# EAGLE board SparkFun_MAX30101_Qwiic-Panel (EAGLE 9.5.2), part 1 of 5
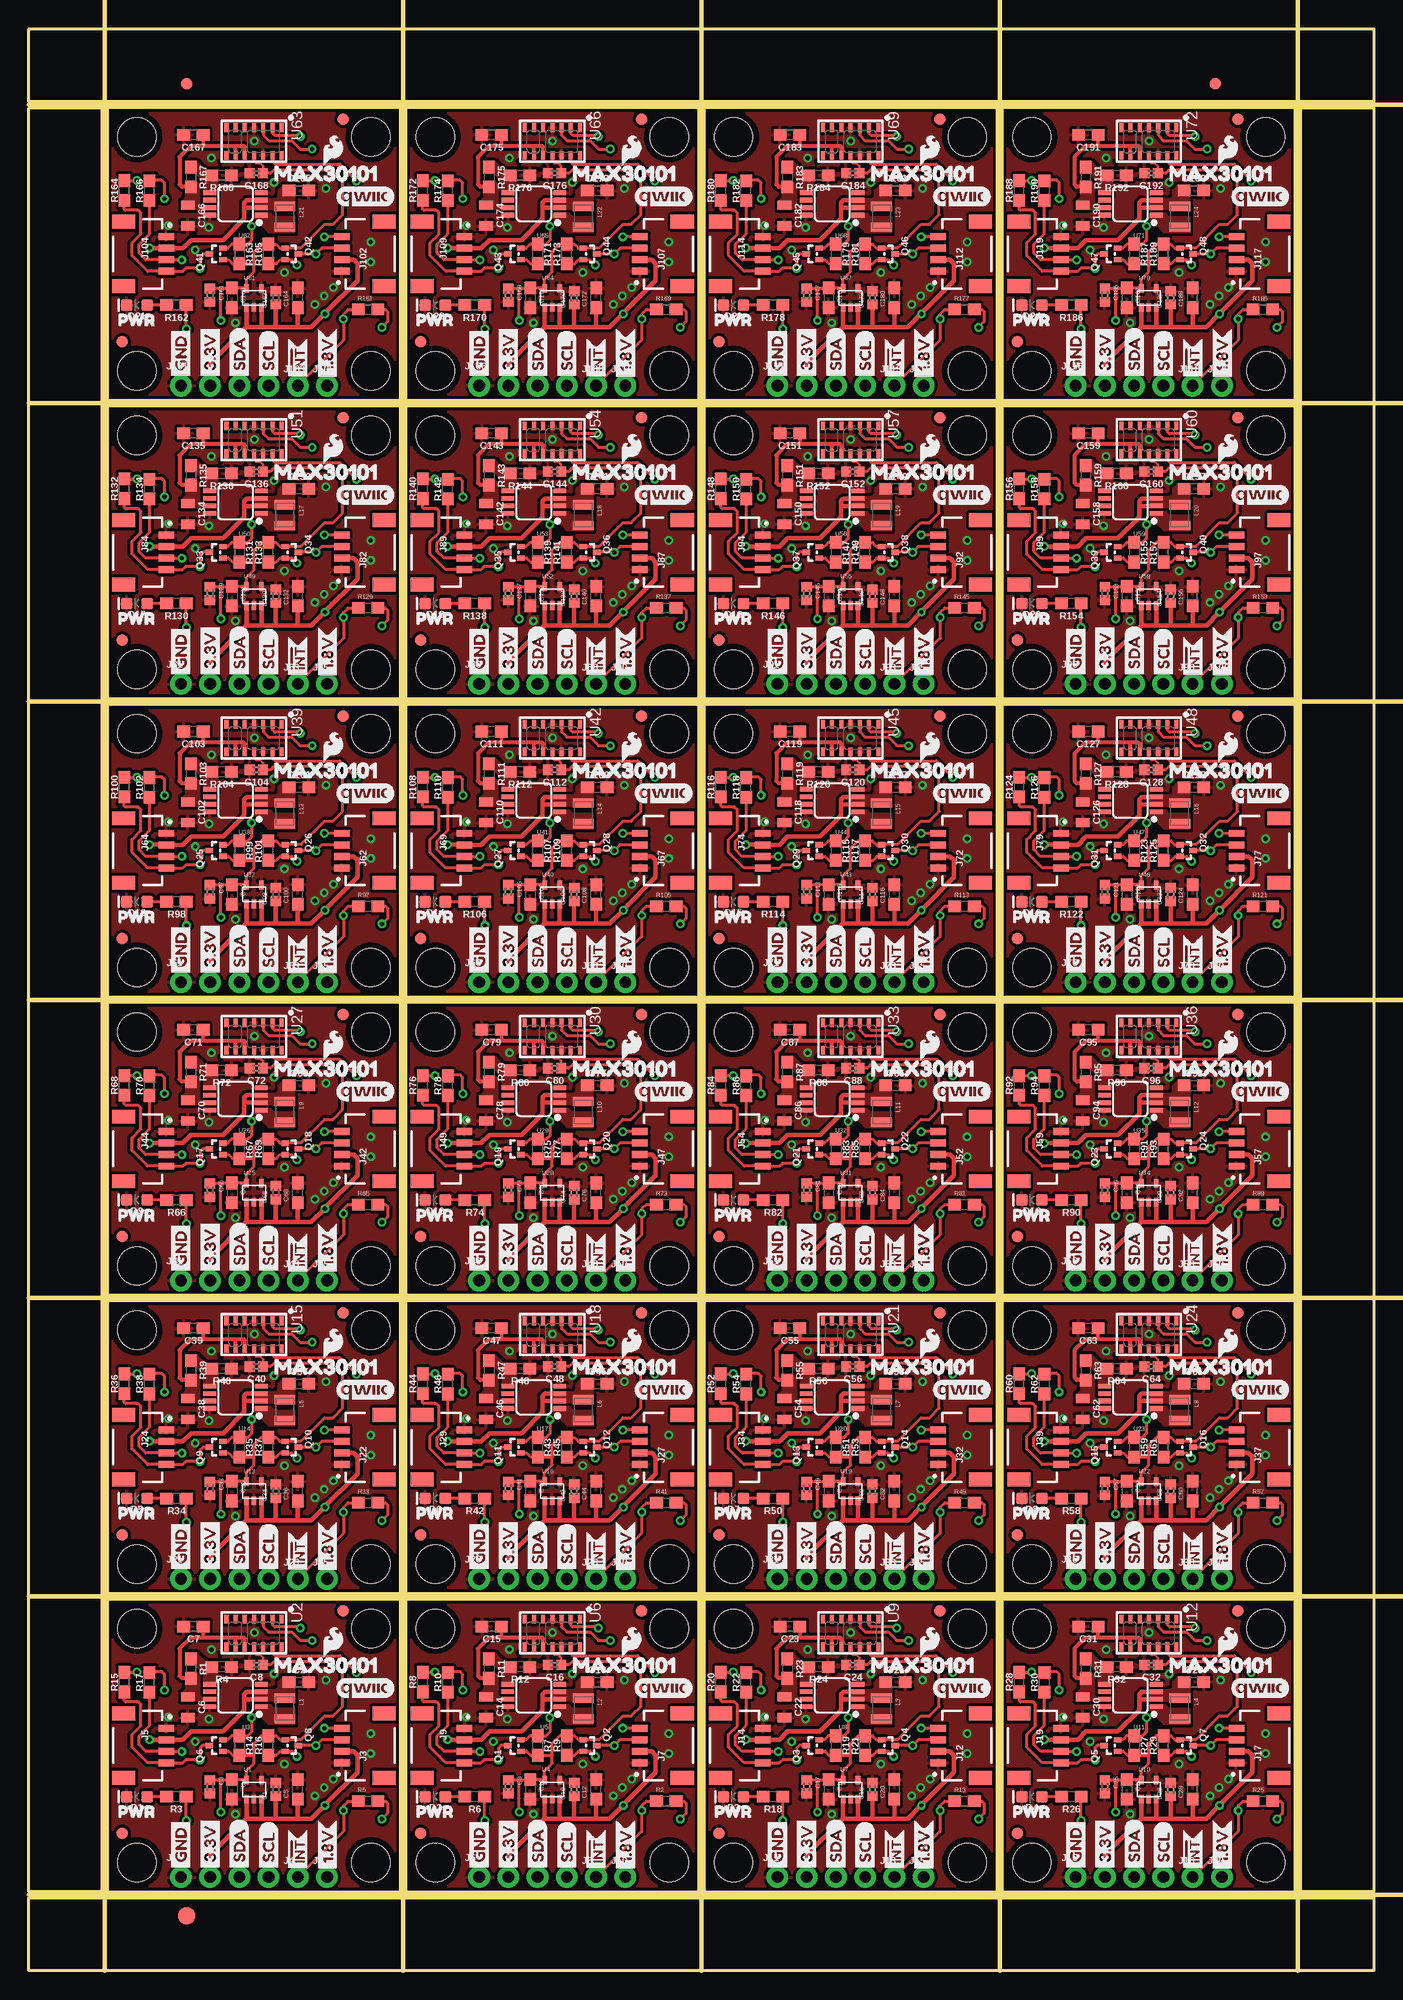
[diagram p0: board, top side]
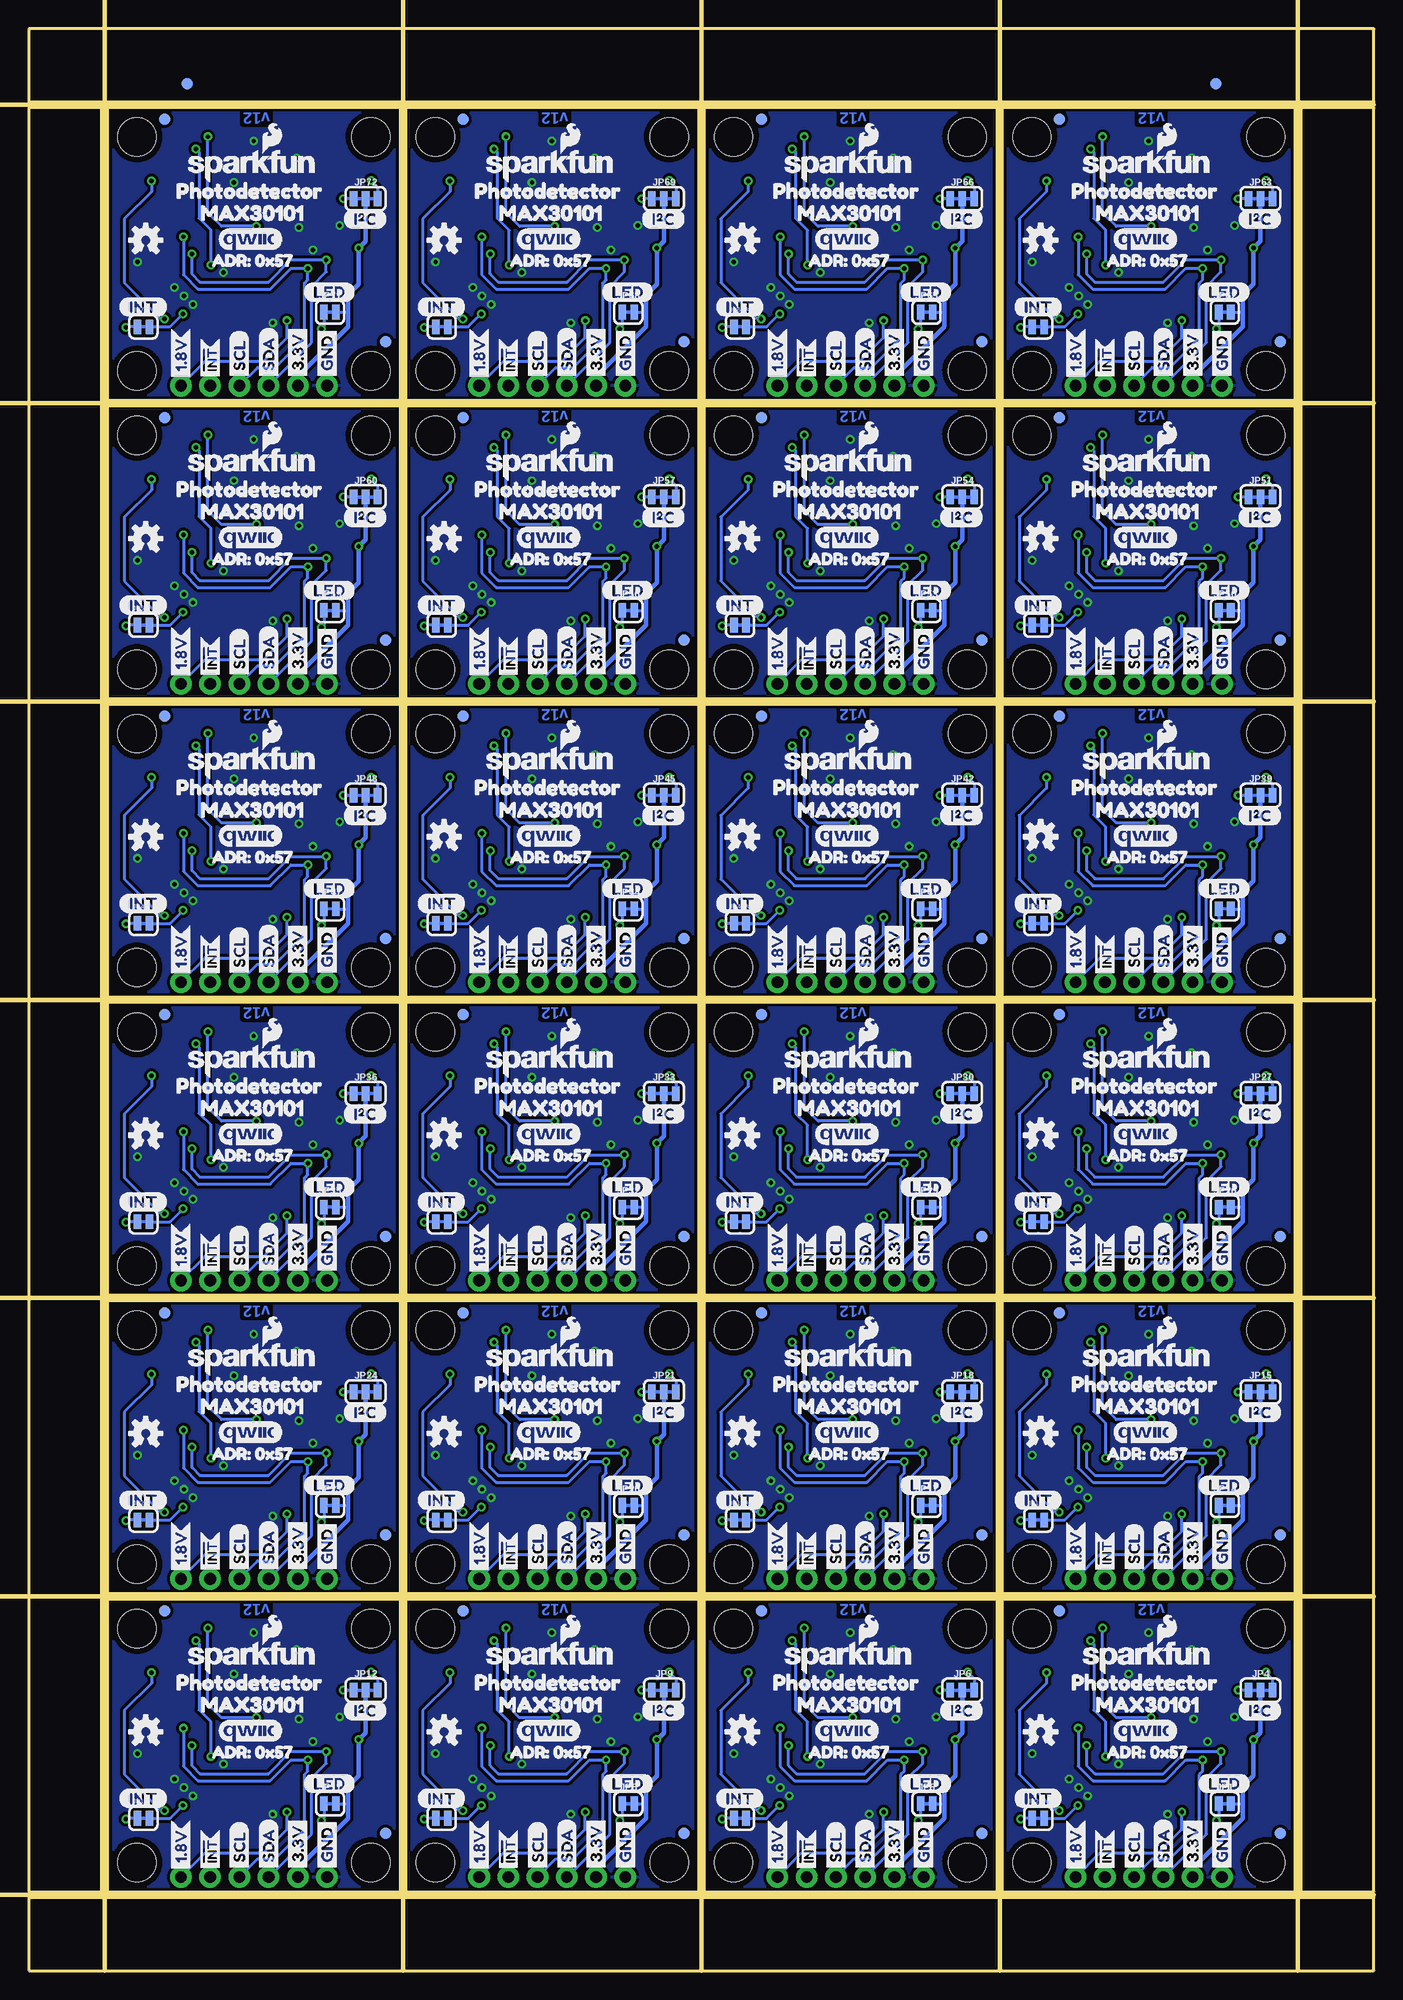
[diagram p1: board, bottom side, seen from below]

Size 116.84 x 168.66 mm. Coordinates in mm from the lower left corner, seen from the top.
Outline: 32.26,32.26 32.26,6.86 6.86,6.86 6.86,32.26 32.26,32.26
Outline: 58.17,32.26 58.17,6.86 32.77,6.86 32.77,32.26 58.17,32.26
Outline: 84.07,32.26 84.07,6.86 58.67,6.86 58.67,32.26 84.07,32.26
Outline: 109.98,32.26 109.98,6.86 84.58,6.86 84.58,32.26 109.98,32.26
Outline: 32.26,58.17 32.26,32.77 6.86,32.77 6.86,58.17 32.26,58.17
Outline: 58.17,58.17 58.17,32.77 32.77,32.77 32.77,58.17 58.17,58.17
Outline: 84.07,58.17 84.07,32.77 58.67,32.77 58.67,58.17 84.07,58.17
Outline: 109.98,58.17 109.98,32.77 84.58,32.77 84.58,58.17 109.98,58.17
Outline: 32.26,84.07 32.26,58.67 6.86,58.67 6.86,84.07 32.26,84.07
Outline: 58.17,84.07 58.17,58.67 32.77,58.67 32.77,84.07 58.17,84.07
Outline: 84.07,84.07 84.07,58.67 58.67,58.67 58.67,84.07 84.07,84.07
Outline: 109.98,84.07 109.98,58.67 84.58,58.67 84.58,84.07 109.98,84.07
Outline: 32.26,109.98 32.26,84.58 6.86,84.58 6.86,109.98 32.26,109.98
Outline: 58.17,109.98 58.17,84.58 32.77,84.58 32.77,109.98 58.17,109.98
Outline: 84.07,109.98 84.07,84.58 58.67,84.58 58.67,109.98 84.07,109.98
Outline: 109.98,109.98 109.98,84.58 84.58,84.58 84.58,109.98 109.98,109.98
Outline: 32.26,135.89 32.26,110.49 6.86,110.49 6.86,135.89 32.26,135.89
Outline: 58.17,135.89 58.17,110.49 32.77,110.49 32.77,135.89 58.17,135.89
Outline: 84.07,135.89 84.07,110.49 58.67,110.49 58.67,135.89 84.07,135.89
Outline: 109.98,135.89 109.98,110.49 84.58,110.49 84.58,135.89 109.98,135.89
Outline: 32.26,161.8 32.26,136.4 6.86,136.4 6.86,161.8 32.26,161.8
Outline: 58.17,161.8 58.17,136.4 32.77,136.4 32.77,161.8 58.17,161.8
Outline: 84.07,161.8 84.07,136.4 58.67,136.4 58.67,161.8 84.07,161.8
Outline: 109.98,161.8 109.98,136.4 84.58,136.4 84.58,161.8 109.98,161.8
Outline: 0,6.35 116.84,6.35 116.84,0 0,0 0,6.35
Outline: 110.49,161.8 116.84,161.8 116.84,6.86 110.49,6.86 110.49,161.8
Outline: 0,168.66 116.84,168.66 116.84,162.31 0,162.31 0,168.66
Outline: 0,161.8 6.35,161.8 6.35,6.86 0,6.86 0,161.8
Copper layers (1*16): Top 0.035mm / dielectric 1.5mm / Bottom 0.035mm
Design rules "SparkFun_MAX30101_Qwiic": minimum track width 7mil, minimum drill 15mil, track to track 7mil, track to pad 7mil, pad to pad 7mil, via to via 7mil, smd to smd 7mil, copper to edge 7mil, drill to drill 7mil, minimum pad ring 7mil, minimum via ring 7mil, stop-mask expansion 4mil, vias tented up to drill 25mil, thermal gap 10mil
Net classes: 1 power: width 0.203 mm
Milling: 12 lines

## Footprints (pad centres in the part's own frame; a part is rotated, then mirrored left to right if it is on the bottom)
0402 = smd 0.85 x 0.9: 1 -0.58,0; 2 0.58,0
0603 = smd 1.1 x 1: 1 -0.85,0; 2 0.85,0
0805 = smd 0.8 x 1.2: 1 -0.9,0; 2 0.9,0
LED-0603 = smd 1 x 1: A -0.877,0; C 0.877,0
FIDUCIAL-1X2 = smd 1 x 1: 1 0,0
FIDUCIAL-1.5X3 = smd 1.5 x 1.5: 1 0,0
1X04_NO_SILK = drill 1.016 pad 1.88: 1 0,0; 2 2.54,0; 3 5.08,0; 4 7.62,0
1X01_NO_SILK = drill 1.016 pad 1.88: 1 0,0
JST04_1MM_RA = smd 0.6 x 1.35: 1 -1.5,0; 2 -0.5,0; 3 0.5,0; 4 1.5,0 | smd 1.2 x 2: NC1 2.8,-3.675; NC2 -2.8,-3.675
SMT-JUMPER_2_NC_TRACE_SILK = smd 0.66 x 1.27: 1 -0.521,0; 2 0.521,0
SMT-JUMPER_3_2-NC_TRACE_SILK = smd 0.66 x 1.27: 1 -1.041,0; 2 0,0; 3 1.041,0
0806 = smd 0.8 x 1.8: 1 -0.9,0; 2 0.9,0
SOT-416FL = smd 0.46 x 0.65: 1 -0.5,-1.1; 2 0.5,-1.1; 3 0,0.05
STAND-OFF = hole 3.302: 0,0
SC70 = smd 0.4 x 0.75: 1 -0.65,-0.825; 2 0,-0.825; 3 0.65,-0.825; 4 0.65,0.825; 5 -0.65,0.825
14_PIN_OESIP = smd 0.75 x 0.35: P1 -1.193,2.409; P2 -1.193,1.609; P3 -1.193,0.809; P4 -1.193,0.009; P5 -1.193,-0.791; P6 -1.193,-1.591; P7 -1.193,-2.391; P8 1.207,-2.391; P9 1.207,-1.591; P10 1.207,-0.791; P11 1.207,0.009; P12 1.207,0.809; P13 1.207,1.609; P14 1.207,2.409
MSOP8 = smd 0.4 x 1.1: 1 -0.975,-2.25; 2 -0.325,-2.25; 3 0.325,-2.25; 4 0.975,-2.25; 5 0.975,2.25; 6 0.325,2.25; 7 -0.325,2.25; 8 -0.975,2.25

## Placement (x,y rotation side)
C1  0.1uF  [0402]  21.46,15.75 90 top
C2  10uF  [0603]  23.47,25.07 0 top
C3  0.1uF  [0402]  15.75,15.98 270 top
C4  10uF  [0603]  17.65,15.75 270 top
C5  10uF  [0603]  23.37,15.75 90 top
C6  22uF  [0805]  13.82,22.89 270 top
C7  10uF  [0603]  14.3,29.9 180 top
C8  0.1uF  [0402]  19.76,26.57 180 top
C9  0.1uF  [0402]  41.66,15.98 270 top
C10  0.1uF  [0402]  47.37,15.75 90 top
C11  10uF  [0603]  43.56,15.75 270 top
C12  10uF  [0603]  49.28,15.75 90 top
C13  10uF  [0603]  49.38,25.07 0 top
C14  22uF  [0805]  39.73,22.89 270 top
C15  10uF  [0603]  40.21,29.9 180 top
C16  0.1uF  [0402]  45.67,26.57 180 top
C17  0.1uF  [0402]  67.56,15.98 270 top
C18  0.1uF  [0402]  73.28,15.75 90 top
C19  10uF  [0603]  69.47,15.75 270 top
C20  10uF  [0603]  75.18,15.75 90 top
C21  10uF  [0603]  75.29,25.07 0 top
C22  22uF  [0805]  65.63,22.89 270 top
C23  10uF  [0603]  66.12,29.9 180 top
C24  0.1uF  [0402]  71.58,26.57 180 top
C25  0.1uF  [0402]  93.47,15.98 270 top
C26  0.1uF  [0402]  99.19,15.75 90 top
C27  10uF  [0603]  95.38,15.75 270 top
C28  10uF  [0603]  101.09,15.75 90 top
C29  10uF  [0603]  101.19,25.07 0 top
C30  22uF  [0805]  91.54,22.89 270 top
C31  10uF  [0603]  92.02,29.9 180 top
C32  0.1uF  [0402]  97.49,26.57 180 top
C33  0.1uF  [0402]  15.75,41.88 270 top
C34  0.1uF  [0402]  21.46,41.66 90 top
C35  10uF  [0603]  17.65,41.66 270 top
C36  10uF  [0603]  23.37,41.66 90 top
C37  10uF  [0603]  23.47,50.98 0 top
C38  22uF  [0805]  13.82,48.79 270 top
C39  10uF  [0603]  14.3,55.8 180 top
C40  0.1uF  [0402]  19.76,52.48 180 top
C41  0.1uF  [0402]  41.66,41.88 270 top
C42  0.1uF  [0402]  47.37,41.66 90 top
C43  10uF  [0603]  43.56,41.66 270 top
C44  10uF  [0603]  49.28,41.66 90 top
C45  10uF  [0603]  49.38,50.98 0 top
C46  22uF  [0805]  39.73,48.79 270 top
C47  10uF  [0603]  40.21,55.8 180 top
C48  0.1uF  [0402]  45.67,52.48 180 top
C49  0.1uF  [0402]  67.56,41.88 270 top
C50  0.1uF  [0402]  73.28,41.66 90 top
C51  10uF  [0603]  69.47,41.66 270 top
C52  10uF  [0603]  75.18,41.66 90 top
C53  10uF  [0603]  75.29,50.98 0 top
C54  22uF  [0805]  65.63,48.79 270 top
C55  10uF  [0603]  66.12,55.8 180 top
C56  0.1uF  [0402]  71.58,52.48 180 top
C57  0.1uF  [0402]  93.47,41.88 270 top
C58  0.1uF  [0402]  99.19,41.66 90 top
C59  10uF  [0603]  95.38,41.66 270 top
C60  10uF  [0603]  101.09,41.66 90 top
C61  10uF  [0603]  101.19,50.98 0 top
C62  22uF  [0805]  91.54,48.79 270 top
C63  10uF  [0603]  92.02,55.8 180 top
C64  0.1uF  [0402]  97.49,52.48 180 top
C65  0.1uF  [0402]  15.75,67.79 270 top
C66  0.1uF  [0402]  21.46,67.56 90 top
C67  10uF  [0603]  17.65,67.56 270 top
C68  10uF  [0603]  23.37,67.56 90 top
C69  10uF  [0603]  23.47,76.89 0 top
C70  22uF  [0805]  13.82,74.7 270 top
C71  10uF  [0603]  14.3,81.71 180 top
C72  0.1uF  [0402]  19.76,78.38 180 top
C73  0.1uF  [0402]  41.66,67.79 270 top
C74  0.1uF  [0402]  47.37,67.56 90 top
C75  10uF  [0603]  43.56,67.56 270 top
C76  10uF  [0603]  49.28,67.56 90 top
C77  10uF  [0603]  49.38,76.89 0 top
C78  22uF  [0805]  39.73,74.7 270 top
C79  10uF  [0603]  40.21,81.71 180 top
C80  0.1uF  [0402]  45.67,78.38 180 top
C81  0.1uF  [0402]  67.56,67.79 270 top
C82  0.1uF  [0402]  73.28,67.56 90 top
C83  10uF  [0603]  69.47,67.56 270 top
C84  10uF  [0603]  75.18,67.56 90 top
C85  10uF  [0603]  75.29,76.89 0 top
C86  22uF  [0805]  65.63,74.7 270 top
C87  10uF  [0603]  66.12,81.71 180 top
C88  0.1uF  [0402]  71.58,78.38 180 top
C89  0.1uF  [0402]  93.47,67.79 270 top
C90  0.1uF  [0402]  99.19,67.56 90 top
C91  10uF  [0603]  95.38,67.56 270 top
C92  10uF  [0603]  101.09,67.56 90 top
C93  10uF  [0603]  101.19,76.89 0 top
C94  22uF  [0805]  91.54,74.7 270 top
C95  10uF  [0603]  92.02,81.71 180 top
C96  0.1uF  [0402]  97.49,78.38 180 top
C97  0.1uF  [0402]  15.75,93.7 270 top
C98  0.1uF  [0402]  21.46,93.47 90 top
C99  10uF  [0603]  17.65,93.47 270 top
C100  10uF  [0603]  23.37,93.47 90 top
C101  10uF  [0603]  23.47,102.79 0 top
C102  22uF  [0805]  13.82,100.61 270 top
C103  10uF  [0603]  14.3,107.62 180 top
C104  0.1uF  [0402]  19.76,104.29 180 top
C105  0.1uF  [0402]  41.66,93.7 270 top
C106  0.1uF  [0402]  47.37,93.47 90 top
C107  10uF  [0603]  43.56,93.47 270 top
C108  10uF  [0603]  49.28,93.47 90 top
C109  10uF  [0603]  49.38,102.79 0 top
C110  22uF  [0805]  39.73,100.61 270 top
C111  10uF  [0603]  40.21,107.62 180 top
C112  0.1uF  [0402]  45.67,104.29 180 top
C113  0.1uF  [0402]  67.56,93.7 270 top
C114  0.1uF  [0402]  73.28,93.47 90 top
C115  10uF  [0603]  69.47,93.47 270 top
C116  10uF  [0603]  75.18,93.47 90 top
C117  10uF  [0603]  75.29,102.79 0 top
C118  22uF  [0805]  65.63,100.61 270 top
C119  10uF  [0603]  66.12,107.62 180 top
C120  0.1uF  [0402]  71.58,104.29 180 top
C121  0.1uF  [0402]  93.47,93.7 270 top
C122  0.1uF  [0402]  99.19,93.47 90 top
C123  10uF  [0603]  95.38,93.47 270 top
C124  10uF  [0603]  101.09,93.47 90 top
C125  10uF  [0603]  101.19,102.79 0 top
C126  22uF  [0805]  91.54,100.61 270 top
C127  10uF  [0603]  92.02,107.62 180 top
C128  0.1uF  [0402]  97.49,104.29 180 top
C129  0.1uF  [0402]  15.75,119.61 270 top
C130  0.1uF  [0402]  21.46,119.38 90 top
C131  10uF  [0603]  17.65,119.38 270 top
C132  10uF  [0603]  23.37,119.38 90 top
C133  10uF  [0603]  23.47,128.7 0 top
C134  22uF  [0805]  13.82,126.52 270 top
C135  10uF  [0603]  14.3,133.53 180 top
C136  0.1uF  [0402]  19.76,130.2 180 top
C137  0.1uF  [0402]  41.66,119.61 270 top
C138  0.1uF  [0402]  47.37,119.38 90 top
C139  10uF  [0603]  43.56,119.38 270 top
C140  10uF  [0603]  49.28,119.38 90 top
C141  10uF  [0603]  49.38,128.7 0 top
C142  22uF  [0805]  39.73,126.52 270 top
C143  10uF  [0603]  40.21,133.53 180 top
C144  0.1uF  [0402]  45.67,130.2 180 top
C145  0.1uF  [0402]  67.56,119.61 270 top
C146  0.1uF  [0402]  73.28,119.38 90 top
C147  10uF  [0603]  69.47,119.38 270 top
C148  10uF  [0603]  75.18,119.38 90 top
C149  10uF  [0603]  75.29,128.7 0 top
C150  22uF  [0805]  65.63,126.52 270 top
C151  10uF  [0603]  66.12,133.53 180 top
C152  0.1uF  [0402]  71.58,130.2 180 top
C153  0.1uF  [0402]  93.47,119.61 270 top
C154  0.1uF  [0402]  99.19,119.38 90 top
C155  10uF  [0603]  95.38,119.38 270 top
C156  10uF  [0603]  101.09,119.38 90 top
C157  10uF  [0603]  101.19,128.7 0 top
C158  22uF  [0805]  91.54,126.52 270 top
C159  10uF  [0603]  92.02,133.53 180 top
C160  0.1uF  [0402]  97.49,130.2 180 top
C161  0.1uF  [0402]  15.75,145.52 270 top
C162  0.1uF  [0402]  21.46,145.29 90 top
C163  10uF  [0603]  17.65,145.29 270 top
C164  10uF  [0603]  23.37,145.29 90 top
C165  10uF  [0603]  23.47,154.61 0 top
C166  22uF  [0805]  13.82,152.43 270 top
C167  10uF  [0603]  14.3,159.44 180 top
C168  0.1uF  [0402]  19.76,156.11 180 top
C169  0.1uF  [0402]  41.66,145.52 270 top
C170  0.1uF  [0402]  47.37,145.29 90 top
C171  10uF  [0603]  43.56,145.29 270 top
C172  10uF  [0603]  49.28,145.29 90 top
C173  10uF  [0603]  49.38,154.61 0 top
C174  22uF  [0805]  39.73,152.43 270 top
C175  10uF  [0603]  40.21,159.44 180 top
C176  0.1uF  [0402]  45.67,156.11 180 top
C177  0.1uF  [0402]  67.56,145.52 270 top
C178  0.1uF  [0402]  73.28,145.29 90 top
C179  10uF  [0603]  69.47,145.29 270 top
C180  10uF  [0603]  75.18,145.29 90 top
C181  10uF  [0603]  75.29,154.61 0 top
C182  22uF  [0805]  65.63,152.43 270 top
C183  10uF  [0603]  66.12,159.44 180 top
C184  0.1uF  [0402]  71.58,156.11 180 top
C185  0.1uF  [0402]  93.47,145.52 270 top
C186  0.1uF  [0402]  99.19,145.29 90 top
C187  10uF  [0603]  95.38,145.29 270 top
C188  10uF  [0603]  101.09,145.29 90 top
C189  10uF  [0603]  101.19,154.61 0 top
C190  22uF  [0805]  91.54,152.43 270 top
C191  10uF  [0603]  92.02,159.44 180 top
C192  0.1uF  [0402]  97.49,156.11 180 top
D1  RED  [LED-0603]  9.4,15.11 180 top
D2  RED  [LED-0603]  35.31,15.11 180 top
D3  RED  [LED-0603]  61.21,15.11 180 top
D4  RED  [LED-0603]  87.12,15.11 180 top
D5  RED  [LED-0603]  9.4,41.02 180 top
D6  RED  [LED-0603]  35.31,41.02 180 top
D7  RED  [LED-0603]  61.21,41.02 180 top
D8  RED  [LED-0603]  87.12,41.02 180 top
D9  RED  [LED-0603]  9.4,66.93 180 top
D10  RED  [LED-0603]  35.31,66.93 180 top
D11  RED  [LED-0603]  61.21,66.93 180 top
D12  RED  [LED-0603]  87.12,66.93 180 top
D13  RED  [LED-0603]  9.4,92.84 180 top
D14  RED  [LED-0603]  35.31,92.84 180 top
D15  RED  [LED-0603]  61.21,92.84 180 top
D16  RED  [LED-0603]  87.12,92.84 180 top
D17  RED  [LED-0603]  9.4,118.75 180 top
D18  RED  [LED-0603]  35.31,118.75 180 top
D19  RED  [LED-0603]  61.21,118.75 180 top
D20  RED  [LED-0603]  87.12,118.75 180 top
D21  RED  [LED-0603]  9.4,144.65 180 top
D22  RED  [LED-0603]  35.31,144.65 180 top
D23  RED  [LED-0603]  61.21,144.65 180 top
D24  RED  [LED-0603]  87.12,144.65 180 top
E$1  [FIDUCIAL-1X2]  13.72,163.89 0 top
E$2  [FIDUCIAL-1X2]  13.72,163.89 0 bottom
E$3  [FIDUCIAL-1X2]  103.06,163.89 0 top
E$4  [FIDUCIAL-1X2]  103.06,163.89 0 bottom
E$5  [FIDUCIAL-1.5X3]  13.72,4.76 0 top
FID1  FIDUCIAL1X2  [FIDUCIAL-1X2]  27.3,31.24 90 top
FID2  FIDUCIAL1X2  [FIDUCIAL-1X2]  8.13,11.94 90 top
FID3  FIDUCIAL1X2  [FIDUCIAL-1X2]  27.3,31.24 0 bottom
FID4  FIDUCIAL1X2  [FIDUCIAL-1X2]  8.13,11.94 0 bottom
FID5  FIDUCIAL1X2  [FIDUCIAL-1X2]  53.21,31.24 90 top
FID6  FIDUCIAL1X2  [FIDUCIAL-1X2]  34.04,11.94 90 top
FID7  FIDUCIAL1X2  [FIDUCIAL-1X2]  53.21,31.24 0 bottom
FID8  FIDUCIAL1X2  [FIDUCIAL-1X2]  34.04,11.94 0 bottom
FID9  FIDUCIAL1X2  [FIDUCIAL-1X2]  79.12,31.24 90 top
FID10  FIDUCIAL1X2  [FIDUCIAL-1X2]  59.94,11.94 90 top
FID11  FIDUCIAL1X2  [FIDUCIAL-1X2]  79.12,31.24 0 bottom
FID12  FIDUCIAL1X2  [FIDUCIAL-1X2]  59.94,11.94 0 bottom
FID13  FIDUCIAL1X2  [FIDUCIAL-1X2]  105.03,31.24 90 top
FID14  FIDUCIAL1X2  [FIDUCIAL-1X2]  85.85,11.94 90 top
FID15  FIDUCIAL1X2  [FIDUCIAL-1X2]  105.03,31.24 0 bottom
FID16  FIDUCIAL1X2  [FIDUCIAL-1X2]  85.85,11.94 0 bottom
FID17  FIDUCIAL1X2  [FIDUCIAL-1X2]  27.3,57.15 90 top
FID18  FIDUCIAL1X2  [FIDUCIAL-1X2]  8.13,37.85 90 top
FID19  FIDUCIAL1X2  [FIDUCIAL-1X2]  27.3,57.15 0 bottom
FID20  FIDUCIAL1X2  [FIDUCIAL-1X2]  8.13,37.85 0 bottom
FID21  FIDUCIAL1X2  [FIDUCIAL-1X2]  53.21,57.15 90 top
FID22  FIDUCIAL1X2  [FIDUCIAL-1X2]  34.04,37.85 90 top
FID23  FIDUCIAL1X2  [FIDUCIAL-1X2]  53.21,57.15 0 bottom
FID24  FIDUCIAL1X2  [FIDUCIAL-1X2]  34.04,37.85 0 bottom
FID25  FIDUCIAL1X2  [FIDUCIAL-1X2]  79.12,57.15 90 top
FID26  FIDUCIAL1X2  [FIDUCIAL-1X2]  59.94,37.85 90 top
FID27  FIDUCIAL1X2  [FIDUCIAL-1X2]  79.12,57.15 0 bottom
FID28  FIDUCIAL1X2  [FIDUCIAL-1X2]  59.94,37.85 0 bottom
FID29  FIDUCIAL1X2  [FIDUCIAL-1X2]  105.03,57.15 90 top
FID30  FIDUCIAL1X2  [FIDUCIAL-1X2]  85.85,37.85 90 top
FID31  FIDUCIAL1X2  [FIDUCIAL-1X2]  105.03,57.15 0 bottom
FID32  FIDUCIAL1X2  [FIDUCIAL-1X2]  85.85,37.85 0 bottom
FID33  FIDUCIAL1X2  [FIDUCIAL-1X2]  27.3,83.06 90 top
FID34  FIDUCIAL1X2  [FIDUCIAL-1X2]  8.13,63.75 90 top
FID35  FIDUCIAL1X2  [FIDUCIAL-1X2]  27.3,83.06 0 bottom
FID36  FIDUCIAL1X2  [FIDUCIAL-1X2]  8.13,63.75 0 bottom
FID37  FIDUCIAL1X2  [FIDUCIAL-1X2]  53.21,83.06 90 top
FID38  FIDUCIAL1X2  [FIDUCIAL-1X2]  34.04,63.75 90 top
FID39  FIDUCIAL1X2  [FIDUCIAL-1X2]  53.21,83.06 0 bottom
FID40  FIDUCIAL1X2  [FIDUCIAL-1X2]  34.04,63.75 0 bottom
FID41  FIDUCIAL1X2  [FIDUCIAL-1X2]  79.12,83.06 90 top
FID42  FIDUCIAL1X2  [FIDUCIAL-1X2]  59.94,63.75 90 top
FID43  FIDUCIAL1X2  [FIDUCIAL-1X2]  79.12,83.06 0 bottom
FID44  FIDUCIAL1X2  [FIDUCIAL-1X2]  59.94,63.75 0 bottom
FID45  FIDUCIAL1X2  [FIDUCIAL-1X2]  105.03,83.06 90 top
FID46  FIDUCIAL1X2  [FIDUCIAL-1X2]  85.85,63.75 90 top
FID47  FIDUCIAL1X2  [FIDUCIAL-1X2]  105.03,83.06 0 bottom
FID48  FIDUCIAL1X2  [FIDUCIAL-1X2]  85.85,63.75 0 bottom
FID49  FIDUCIAL1X2  [FIDUCIAL-1X2]  27.3,108.97 90 top
FID50  FIDUCIAL1X2  [FIDUCIAL-1X2]  8.13,89.66 90 top
FID51  FIDUCIAL1X2  [FIDUCIAL-1X2]  27.3,108.97 0 bottom
FID52  FIDUCIAL1X2  [FIDUCIAL-1X2]  8.13,89.66 0 bottom
FID53  FIDUCIAL1X2  [FIDUCIAL-1X2]  53.21,108.97 90 top
FID54  FIDUCIAL1X2  [FIDUCIAL-1X2]  34.04,89.66 90 top
FID55  FIDUCIAL1X2  [FIDUCIAL-1X2]  53.21,108.97 0 bottom
FID56  FIDUCIAL1X2  [FIDUCIAL-1X2]  34.04,89.66 0 bottom
FID57  FIDUCIAL1X2  [FIDUCIAL-1X2]  79.12,108.97 90 top
FID58  FIDUCIAL1X2  [FIDUCIAL-1X2]  59.94,89.66 90 top
FID59  FIDUCIAL1X2  [FIDUCIAL-1X2]  79.12,108.97 0 bottom
FID60  FIDUCIAL1X2  [FIDUCIAL-1X2]  59.94,89.66 0 bottom
FID61  FIDUCIAL1X2  [FIDUCIAL-1X2]  105.03,108.97 90 top
FID62  FIDUCIAL1X2  [FIDUCIAL-1X2]  85.85,89.66 90 top
FID63  FIDUCIAL1X2  [FIDUCIAL-1X2]  105.03,108.97 0 bottom
FID64  FIDUCIAL1X2  [FIDUCIAL-1X2]  85.85,89.66 0 bottom
FID65  FIDUCIAL1X2  [FIDUCIAL-1X2]  27.3,134.87 90 top
FID66  FIDUCIAL1X2  [FIDUCIAL-1X2]  8.13,115.57 90 top
FID67  FIDUCIAL1X2  [FIDUCIAL-1X2]  27.3,134.87 0 bottom
FID68  FIDUCIAL1X2  [FIDUCIAL-1X2]  8.13,115.57 0 bottom
FID69  FIDUCIAL1X2  [FIDUCIAL-1X2]  53.21,134.87 90 top
FID70  FIDUCIAL1X2  [FIDUCIAL-1X2]  34.04,115.57 90 top
FID71  FIDUCIAL1X2  [FIDUCIAL-1X2]  53.21,134.87 0 bottom
FID72  FIDUCIAL1X2  [FIDUCIAL-1X2]  34.04,115.57 0 bottom
FID73  FIDUCIAL1X2  [FIDUCIAL-1X2]  79.12,134.87 90 top
FID74  FIDUCIAL1X2  [FIDUCIAL-1X2]  59.94,115.57 90 top
FID75  FIDUCIAL1X2  [FIDUCIAL-1X2]  79.12,134.87 0 bottom
FID76  FIDUCIAL1X2  [FIDUCIAL-1X2]  59.94,115.57 0 bottom
FID77  FIDUCIAL1X2  [FIDUCIAL-1X2]  105.03,134.87 90 top
FID78  FIDUCIAL1X2  [FIDUCIAL-1X2]  85.85,115.57 90 top
FID79  FIDUCIAL1X2  [FIDUCIAL-1X2]  105.03,134.87 0 bottom
FID80  FIDUCIAL1X2  [FIDUCIAL-1X2]  85.85,115.57 0 bottom
FID81  FIDUCIAL1X2  [FIDUCIAL-1X2]  27.3,160.78 90 top
FID82  FIDUCIAL1X2  [FIDUCIAL-1X2]  8.13,141.48 90 top
FID83  FIDUCIAL1X2  [FIDUCIAL-1X2]  27.3,160.78 0 bottom
FID84  FIDUCIAL1X2  [FIDUCIAL-1X2]  8.13,141.48 0 bottom
FID85  FIDUCIAL1X2  [FIDUCIAL-1X2]  53.21,160.78 90 top
FID86  FIDUCIAL1X2  [FIDUCIAL-1X2]  34.04,141.48 90 top
FID87  FIDUCIAL1X2  [FIDUCIAL-1X2]  53.21,160.78 0 bottom
FID88  FIDUCIAL1X2  [FIDUCIAL-1X2]  34.04,141.48 0 bottom
FID89  FIDUCIAL1X2  [FIDUCIAL-1X2]  79.12,160.78 90 top
FID90  FIDUCIAL1X2  [FIDUCIAL-1X2]  59.94,141.48 90 top
FID91  FIDUCIAL1X2  [FIDUCIAL-1X2]  79.12,160.78 0 bottom
FID92  FIDUCIAL1X2  [FIDUCIAL-1X2]  59.94,141.48 0 bottom
FID93  FIDUCIAL1X2  [FIDUCIAL-1X2]  105.03,160.78 90 top
FID94  FIDUCIAL1X2  [FIDUCIAL-1X2]  85.85,141.48 90 top
FID95  FIDUCIAL1X2  [FIDUCIAL-1X2]  105.03,160.78 0 bottom
FID96  FIDUCIAL1X2  [FIDUCIAL-1X2]  85.85,141.48 0 bottom
J1  PTH  [1X04_NO_SILK]  13.21,8.13 0 top
J2  [1X01_NO_SILK]  25.91,8.13 0 top
J3  QWIIC_RA  [JST04_1MM_RA]  27.18,19.56 90 top
J4  [1X01_NO_SILK]  23.37,8.13 0 top
J5  QWIIC_RA  [JST04_1MM_RA]  11.94,19.56 270 top
J6  PTH  [1X04_NO_SILK]  39.12,8.13 0 top
J7  QWIIC_RA  [JST04_1MM_RA]  53.09,19.56 90 top
J8  [1X01_NO_SILK]  49.28,8.13 0 top
J9  QWIIC_RA  [JST04_1MM_RA]  37.85,19.56 270 top
J10  [1X01_NO_SILK]  51.82,8.13 0 top
J11  PTH  [1X04_NO_SILK]  65.02,8.13 0 top
J12  QWIIC_RA  [JST04_1MM_RA]  78.99,19.56 90 top
J13  [1X01_NO_SILK]  75.18,8.13 0 top
J14  QWIIC_RA  [JST04_1MM_RA]  63.75,19.56 270 top
J15  [1X01_NO_SILK]  77.72,8.13 0 top
J16  PTH  [1X04_NO_SILK]  90.93,8.13 0 top
J17  QWIIC_RA  [JST04_1MM_RA]  104.9,19.56 90 top
J18  [1X01_NO_SILK]  101.09,8.13 0 top
J19  QWIIC_RA  [JST04_1MM_RA]  89.66,19.56 270 top
J20  [1X01_NO_SILK]  103.63,8.13 0 top
J21  PTH  [1X04_NO_SILK]  13.21,34.04 0 top
J22  QWIIC_RA  [JST04_1MM_RA]  27.18,45.47 90 top
J23  [1X01_NO_SILK]  23.37,34.04 0 top
J24  QWIIC_RA  [JST04_1MM_RA]  11.94,45.47 270 top
J25  [1X01_NO_SILK]  25.91,34.04 0 top
J26  PTH  [1X04_NO_SILK]  39.12,34.04 0 top
J27  QWIIC_RA  [JST04_1MM_RA]  53.09,45.47 90 top
J28  [1X01_NO_SILK]  49.28,34.04 0 top
J29  QWIIC_RA  [JST04_1MM_RA]  37.85,45.47 270 top
J30  [1X01_NO_SILK]  51.82,34.04 0 top
J31  PTH  [1X04_NO_SILK]  65.02,34.04 0 top
J32  QWIIC_RA  [JST04_1MM_RA]  78.99,45.47 90 top
J33  [1X01_NO_SILK]  75.18,34.04 0 top
J34  QWIIC_RA  [JST04_1MM_RA]  63.75,45.47 270 top
J35  [1X01_NO_SILK]  77.72,34.04 0 top
J36  PTH  [1X04_NO_SILK]  90.93,34.04 0 top
J37  QWIIC_RA  [JST04_1MM_RA]  104.9,45.47 90 top
J38  [1X01_NO_SILK]  101.09,34.04 0 top
J39  QWIIC_RA  [JST04_1MM_RA]  89.66,45.47 270 top
J40  [1X01_NO_SILK]  103.63,34.04 0 top
J41  PTH  [1X04_NO_SILK]  13.21,59.94 0 top
J42  QWIIC_RA  [JST04_1MM_RA]  27.18,71.37 90 top
J43  [1X01_NO_SILK]  23.37,59.94 0 top
J44  QWIIC_RA  [JST04_1MM_RA]  11.94,71.37 270 top
J45  [1X01_NO_SILK]  25.91,59.94 0 top
J46  PTH  [1X04_NO_SILK]  39.12,59.94 0 top
J47  QWIIC_RA  [JST04_1MM_RA]  53.09,71.37 90 top
J48  [1X01_NO_SILK]  49.28,59.94 0 top
J49  QWIIC_RA  [JST04_1MM_RA]  37.85,71.37 270 top
J50  [1X01_NO_SILK]  51.82,59.94 0 top
J51  PTH  [1X04_NO_SILK]  65.02,59.94 0 top
J52  QWIIC_RA  [JST04_1MM_RA]  78.99,71.37 90 top
J53  [1X01_NO_SILK]  75.18,59.94 0 top
J54  QWIIC_RA  [JST04_1MM_RA]  63.75,71.37 270 top
J55  [1X01_NO_SILK]  77.72,59.94 0 top
J56  PTH  [1X04_NO_SILK]  90.93,59.94 0 top
J57  QWIIC_RA  [JST04_1MM_RA]  104.9,71.37 90 top
J58  [1X01_NO_SILK]  101.09,59.94 0 top
J59  QWIIC_RA  [JST04_1MM_RA]  89.66,71.37 270 top
J60  [1X01_NO_SILK]  103.63,59.94 0 top
J61  PTH  [1X04_NO_SILK]  13.21,85.85 0 top
J62  QWIIC_RA  [JST04_1MM_RA]  27.18,97.28 90 top
J63  [1X01_NO_SILK]  23.37,85.85 0 top
J64  QWIIC_RA  [JST04_1MM_RA]  11.94,97.28 270 top
J65  [1X01_NO_SILK]  25.91,85.85 0 top
J66  PTH  [1X04_NO_SILK]  39.12,85.85 0 top
J67  QWIIC_RA  [JST04_1MM_RA]  53.09,97.28 90 top
J68  [1X01_NO_SILK]  49.28,85.85 0 top
J69  QWIIC_RA  [JST04_1MM_RA]  37.85,97.28 270 top
J70  [1X01_NO_SILK]  51.82,85.85 0 top
J71  PTH  [1X04_NO_SILK]  65.02,85.85 0 top
J72  QWIIC_RA  [JST04_1MM_RA]  78.99,97.28 90 top
J73  [1X01_NO_SILK]  75.18,85.85 0 top
J74  QWIIC_RA  [JST04_1MM_RA]  63.75,97.28 270 top
J75  [1X01_NO_SILK]  77.72,85.85 0 top
J76  PTH  [1X04_NO_SILK]  90.93,85.85 0 top
J77  QWIIC_RA  [JST04_1MM_RA]  104.9,97.28 90 top
J78  [1X01_NO_SILK]  101.09,85.85 0 top
J79  QWIIC_RA  [JST04_1MM_RA]  89.66,97.28 270 top
J80  [1X01_NO_SILK]  103.63,85.85 0 top
J81  PTH  [1X04_NO_SILK]  13.21,111.76 0 top
J82  QWIIC_RA  [JST04_1MM_RA]  27.18,123.19 90 top
J83  [1X01_NO_SILK]  23.37,111.76 0 top
J84  QWIIC_RA  [JST04_1MM_RA]  11.94,123.19 270 top
J85  [1X01_NO_SILK]  25.91,111.76 0 top
J86  PTH  [1X04_NO_SILK]  39.12,111.76 0 top
J87  QWIIC_RA  [JST04_1MM_RA]  53.09,123.19 90 top
J88  [1X01_NO_SILK]  49.28,111.76 0 top
J89  QWIIC_RA  [JST04_1MM_RA]  37.85,123.19 270 top
J90  [1X01_NO_SILK]  51.82,111.76 0 top
J91  PTH  [1X04_NO_SILK]  65.02,111.76 0 top
J92  QWIIC_RA  [JST04_1MM_RA]  78.99,123.19 90 top
J93  [1X01_NO_SILK]  75.18,111.76 0 top
J94  QWIIC_RA  [JST04_1MM_RA]  63.75,123.19 270 top
J95  [1X01_NO_SILK]  77.72,111.76 0 top
J96  PTH  [1X04_NO_SILK]  90.93,111.76 0 top
J97  QWIIC_RA  [JST04_1MM_RA]  104.9,123.19 90 top
J98  [1X01_NO_SILK]  101.09,111.76 0 top
J99  QWIIC_RA  [JST04_1MM_RA]  89.66,123.19 270 top
J100  [1X01_NO_SILK]  103.63,111.76 0 top
J101  PTH  [1X04_NO_SILK]  13.21,137.67 0 top
J102  QWIIC_RA  [JST04_1MM_RA]  27.18,149.1 90 top
J103  [1X01_NO_SILK]  23.37,137.67 0 top
J104  QWIIC_RA  [JST04_1MM_RA]  11.94,149.1 270 top
J105  [1X01_NO_SILK]  25.91,137.67 0 top
J106  PTH  [1X04_NO_SILK]  39.12,137.67 0 top
J107  QWIIC_RA  [JST04_1MM_RA]  53.09,149.1 90 top
J108  [1X01_NO_SILK]  49.28,137.67 0 top
J109  QWIIC_RA  [JST04_1MM_RA]  37.85,149.1 270 top
J110  [1X01_NO_SILK]  51.82,137.67 0 top
J111  PTH  [1X04_NO_SILK]  65.02,137.67 0 top
J112  QWIIC_RA  [JST04_1MM_RA]  78.99,149.1 90 top
J113  [1X01_NO_SILK]  75.18,137.67 0 top
J114  QWIIC_RA  [JST04_1MM_RA]  63.75,149.1 270 top
J115  [1X01_NO_SILK]  77.72,137.67 0 top
J116  PTH  [1X04_NO_SILK]  90.93,137.67 0 top
J117  QWIIC_RA  [JST04_1MM_RA]  104.9,149.1 90 top
J118  [1X01_NO_SILK]  101.09,137.67 0 top
J119  QWIIC_RA  [JST04_1MM_RA]  89.66,149.1 270 top
J120  [1X01_NO_SILK]  103.63,137.67 0 top
JP1  LED  [SMT-JUMPER_2_NC_TRACE_SILK]  12.95,14.5 0 bottom
JP2  INT  [SMT-JUMPER_2_NC_TRACE_SILK]  29.16,13.23 0 bottom
JP3  INT  [SMT-JUMPER_2_NC_TRACE_SILK]  55.07,13.23 0 bottom
JP4  I2C PU  [SMT-JUMPER_3_2-NC_TRACE_SILK]  9.86,24.36 0 bottom
JP5  LED  [SMT-JUMPER_2_NC_TRACE_SILK]  38.86,14.5 0 bottom
JP6  I2C PU  [SMT-JUMPER_3_2-NC_TRACE_SILK]  35.76,24.36 0 bottom
JP7  INT  [SMT-JUMPER_2_NC_TRACE_SILK]  80.98,13.23 0 bottom
JP8  LED  [SMT-JUMPER_2_NC_TRACE_SILK]  64.77,14.5 0 bottom
JP9  I2C PU  [SMT-JUMPER_3_2-NC_TRACE_SILK]  61.67,24.36 0 bottom
JP10  INT  [SMT-JUMPER_2_NC_TRACE_SILK]  106.88,13.23 0 bottom
JP11  LED  [SMT-JUMPER_2_NC_TRACE_SILK]  90.68,14.5 0 bottom
JP12  I2C PU  [SMT-JUMPER_3_2-NC_TRACE_SILK]  87.58,24.36 0 bottom
JP13  INT  [SMT-JUMPER_2_NC_TRACE_SILK]  29.16,39.14 0 bottom
JP14  LED  [SMT-JUMPER_2_NC_TRACE_SILK]  12.95,40.41 0 bottom
JP15  I2C PU  [SMT-JUMPER_3_2-NC_TRACE_SILK]  9.86,50.27 0 bottom
JP16  INT  [SMT-JUMPER_2_NC_TRACE_SILK]  55.07,39.14 0 bottom
JP17  LED  [SMT-JUMPER_2_NC_TRACE_SILK]  38.86,40.41 0 bottom
JP18  I2C PU  [SMT-JUMPER_3_2-NC_TRACE_SILK]  35.76,50.27 0 bottom
JP19  INT  [SMT-JUMPER_2_NC_TRACE_SILK]  80.98,39.14 0 bottom
JP20  LED  [SMT-JUMPER_2_NC_TRACE_SILK]  64.77,40.41 0 bottom
JP21  I2C PU  [SMT-JUMPER_3_2-NC_TRACE_SILK]  61.67,50.27 0 bottom
JP22  INT  [SMT-JUMPER_2_NC_TRACE_SILK]  106.88,39.14 0 bottom
JP23  LED  [SMT-JUMPER_2_NC_TRACE_SILK]  90.68,40.41 0 bottom
JP24  I2C PU  [SMT-JUMPER_3_2-NC_TRACE_SILK]  87.58,50.27 0 bottom
JP25  INT  [SMT-JUMPER_2_NC_TRACE_SILK]  29.16,65.05 0 bottom
JP26  LED  [SMT-JUMPER_2_NC_TRACE_SILK]  12.95,66.32 0 bottom
JP27  I2C PU  [SMT-JUMPER_3_2-NC_TRACE_SILK]  9.86,76.17 0 bottom
JP28  INT  [SMT-JUMPER_2_NC_TRACE_SILK]  55.07,65.05 0 bottom
JP29  LED  [SMT-JUMPER_2_NC_TRACE_SILK]  38.86,66.32 0 bottom
JP30  I2C PU  [SMT-JUMPER_3_2-NC_TRACE_SILK]  35.76,76.17 0 bottom
JP31  INT  [SMT-JUMPER_2_NC_TRACE_SILK]  80.98,65.05 0 bottom
JP32  LED  [SMT-JUMPER_2_NC_TRACE_SILK]  64.77,66.32 0 bottom
JP33  I2C PU  [SMT-JUMPER_3_2-NC_TRACE_SILK]  61.67,76.17 0 bottom
JP34  INT  [SMT-JUMPER_2_NC_TRACE_SILK]  106.88,65.05 0 bottom
JP35  LED  [SMT-JUMPER_2_NC_TRACE_SILK]  90.68,66.32 0 bottom
JP36  I2C PU  [SMT-JUMPER_3_2-NC_TRACE_SILK]  87.58,76.17 0 bottom
JP37  INT  [SMT-JUMPER_2_NC_TRACE_SILK]  29.16,90.96 0 bottom
JP38  LED  [SMT-JUMPER_2_NC_TRACE_SILK]  12.95,92.23 0 bottom
JP39  I2C PU  [SMT-JUMPER_3_2-NC_TRACE_SILK]  9.86,102.08 0 bottom
JP40  INT  [SMT-JUMPER_2_NC_TRACE_SILK]  55.07,90.96 0 bottom
JP41  LED  [SMT-JUMPER_2_NC_TRACE_SILK]  38.86,92.23 0 bottom
JP42  I2C PU  [SMT-JUMPER_3_2-NC_TRACE_SILK]  35.76,102.08 0 bottom
JP43  INT  [SMT-JUMPER_2_NC_TRACE_SILK]  80.98,90.96 0 bottom
JP44  LED  [SMT-JUMPER_2_NC_TRACE_SILK]  64.77,92.23 0 bottom
JP45  I2C PU  [SMT-JUMPER_3_2-NC_TRACE_SILK]  61.67,102.08 0 bottom
JP46  INT  [SMT-JUMPER_2_NC_TRACE_SILK]  106.88,90.96 0 bottom
JP47  LED  [SMT-JUMPER_2_NC_TRACE_SILK]  90.68,92.23 0 bottom
JP48  I2C PU  [SMT-JUMPER_3_2-NC_TRACE_SILK]  87.58,102.08 0 bottom
JP49  INT  [SMT-JUMPER_2_NC_TRACE_SILK]  29.16,116.87 0 bottom
JP50  LED  [SMT-JUMPER_2_NC_TRACE_SILK]  12.95,118.14 0 bottom
JP51  I2C PU  [SMT-JUMPER_3_2-NC_TRACE_SILK]  9.86,127.99 0 bottom
JP52  INT  [SMT-JUMPER_2_NC_TRACE_SILK]  55.07,116.87 0 bottom
JP53  LED  [SMT-JUMPER_2_NC_TRACE_SILK]  38.86,118.14 0 bottom
JP54  I2C PU  [SMT-JUMPER_3_2-NC_TRACE_SILK]  35.76,127.99 0 bottom
JP55  INT  [SMT-JUMPER_2_NC_TRACE_SILK]  80.98,116.87 0 bottom
JP56  LED  [SMT-JUMPER_2_NC_TRACE_SILK]  64.77,118.14 0 bottom
JP57  I2C PU  [SMT-JUMPER_3_2-NC_TRACE_SILK]  61.67,127.99 0 bottom
JP58  INT  [SMT-JUMPER_2_NC_TRACE_SILK]  106.88,116.87 0 bottom
JP59  LED  [SMT-JUMPER_2_NC_TRACE_SILK]  90.68,118.14 0 bottom
JP60  I2C PU  [SMT-JUMPER_3_2-NC_TRACE_SILK]  87.58,127.99 0 bottom
JP61  INT  [SMT-JUMPER_2_NC_TRACE_SILK]  29.16,142.77 0 bottom
JP62  LED  [SMT-JUMPER_2_NC_TRACE_SILK]  12.95,144.04 0 bottom
JP63  I2C PU  [SMT-JUMPER_3_2-NC_TRACE_SILK]  9.86,153.9 0 bottom
JP64  INT  [SMT-JUMPER_2_NC_TRACE_SILK]  55.07,142.77 0 bottom
JP65  LED  [SMT-JUMPER_2_NC_TRACE_SILK]  38.86,144.04 0 bottom
JP66  I2C PU  [SMT-JUMPER_3_2-NC_TRACE_SILK]  35.76,153.9 0 bottom
JP67  INT  [SMT-JUMPER_2_NC_TRACE_SILK]  80.98,142.77 0 bottom
JP68  LED  [SMT-JUMPER_2_NC_TRACE_SILK]  64.77,144.04 0 bottom
JP69  I2C PU  [SMT-JUMPER_3_2-NC_TRACE_SILK]  61.67,153.9 0 bottom
JP70  INT  [SMT-JUMPER_2_NC_TRACE_SILK]  106.88,142.77 0 bottom
JP71  LED  [SMT-JUMPER_2_NC_TRACE_SILK]  90.68,144.04 0 bottom
JP72  I2C PU  [SMT-JUMPER_3_2-NC_TRACE_SILK]  87.58,153.9 0 bottom
L1  2.2μH  [0806]  22.25,22.78 270 top
L2  2.2μH  [0806]  48.16,22.78 270 top
L3  2.2μH  [0806]  74.07,22.78 270 top
L4  2.2μH  [0806]  99.97,22.78 270 top
L5  2.2μH  [0806]  22.25,48.69 270 top
L6  2.2μH  [0806]  48.16,48.69 270 top
L7  2.2μH  [0806]  74.07,48.69 270 top
L8  2.2μH  [0806]  99.97,48.69 270 top
L9  2.2μH  [0806]  22.25,74.6 270 top
L10  2.2μH  [0806]  48.16,74.6 270 top
L11  2.2μH  [0806]  74.07,74.6 270 top
L12  2.2μH  [0806]  99.97,74.6 270 top
L13  2.2μH  [0806]  22.25,100.51 270 top
L14  2.2μH  [0806]  48.16,100.51 270 top
L15  2.2μH  [0806]  74.07,100.51 270 top
L16  2.2μH  [0806]  99.97,100.51 270 top
L17  2.2μH  [0806]  22.25,126.42 270 top
L18  2.2μH  [0806]  48.16,126.42 270 top
L19  2.2μH  [0806]  74.07,126.42 270 top
L20  2.2μH  [0806]  99.97,126.42 270 top
L21  2.2μH  [0806]  22.25,152.32 270 top
L22  2.2μH  [0806]  48.16,152.32 270 top
L23  2.2μH  [0806]  74.07,152.32 270 top
L24  2.2μH  [0806]  99.97,152.32 270 top
LOGO1  SFE_LOGO_NAME_FLAME.1_INCH  [SFE_LOGO_NAME_FLAME_.1]  19.71,27.2 0 bottom
LOGO2  OSHW-LOGOS  [OSHW-LOGO-S]  28.96,20.75 0 bottom
LOGO3  QWIIC_LOGO_5MM  [QWIIC_5MM]  29.21,24.56 0 top
LOGO4  SFE_LOGO_FLAME.1_INCH  [SFE_LOGO_FLAME_.1]  26.44,28.55 0 top
LOGO5  SFE_LOGO_NAME_FLAME.1_INCH  [SFE_LOGO_NAME_FLAME_.1]  45.62,27.2 0 bottom
LOGO6  OSHW-LOGOS  [OSHW-LOGO-S]  54.86,20.75 0 bottom
LOGO7  SFE_LOGO_FLAME.1_INCH  [SFE_LOGO_FLAME_.1]  52.35,28.55 0 top
LOGO8  QWIIC_LOGO_5MM  [QWIIC_5MM]  55.12,24.56 0 top
LOGO9  SFE_LOGO_NAME_FLAME.1_INCH  [SFE_LOGO_NAME_FLAME_.1]  71.53,27.2 0 bottom
LOGO10  OSHW-LOGOS  [OSHW-LOGO-S]  80.77,20.75 0 bottom
LOGO11  SFE_LOGO_FLAME.1_INCH  [SFE_LOGO_FLAME_.1]  78.26,28.55 0 top
LOGO12  QWIIC_LOGO_5MM  [QWIIC_5MM]  81.03,24.56 0 top
LOGO13  SFE_LOGO_NAME_FLAME.1_INCH  [SFE_LOGO_NAME_FLAME_.1]  97.43,27.2 0 bottom
LOGO14  OSHW-LOGOS  [OSHW-LOGO-S]  106.68,20.75 0 bottom
LOGO15  SFE_LOGO_FLAME.1_INCH  [SFE_LOGO_FLAME_.1]  104.17,28.55 0 top
LOGO16  QWIIC_LOGO_5MM  [QWIIC_5MM]  106.93,24.56 0 top
LOGO17  SFE_LOGO_NAME_FLAME.1_INCH  [SFE_LOGO_NAME_FLAME_.1]  19.71,53.11 0 bottom
LOGO18  OSHW-LOGOS  [OSHW-LOGO-S]  28.96,46.66 0 bottom
LOGO19  SFE_LOGO_FLAME.1_INCH  [SFE_LOGO_FLAME_.1]  26.44,54.46 0 top
LOGO20  QWIIC_LOGO_5MM  [QWIIC_5MM]  29.21,50.47 0 top
LOGO21  SFE_LOGO_NAME_FLAME.1_INCH  [SFE_LOGO_NAME_FLAME_.1]  45.62,53.11 0 bottom
LOGO22  OSHW-LOGOS  [OSHW-LOGO-S]  54.86,46.66 0 bottom
LOGO23  SFE_LOGO_FLAME.1_INCH  [SFE_LOGO_FLAME_.1]  52.35,54.46 0 top
LOGO24  QWIIC_LOGO_5MM  [QWIIC_5MM]  55.12,50.47 0 top
LOGO25  SFE_LOGO_NAME_FLAME.1_INCH  [SFE_LOGO_NAME_FLAME_.1]  71.53,53.11 0 bottom
LOGO26  OSHW-LOGOS  [OSHW-LOGO-S]  80.77,46.66 0 bottom
LOGO27  SFE_LOGO_FLAME.1_INCH  [SFE_LOGO_FLAME_.1]  78.26,54.46 0 top
LOGO28  QWIIC_LOGO_5MM  [QWIIC_5MM]  81.03,50.47 0 top
LOGO29  SFE_LOGO_NAME_FLAME.1_INCH  [SFE_LOGO_NAME_FLAME_.1]  97.43,53.11 0 bottom
LOGO30  OSHW-LOGOS  [OSHW-LOGO-S]  106.68,46.66 0 bottom
LOGO31  SFE_LOGO_FLAME.1_INCH  [SFE_LOGO_FLAME_.1]  104.17,54.46 0 top
LOGO32  QWIIC_LOGO_5MM  [QWIIC_5MM]  106.93,50.47 0 top
LOGO33  SFE_LOGO_NAME_FLAME.1_INCH  [SFE_LOGO_NAME_FLAME_.1]  19.71,79.02 0 bottom
LOGO34  OSHW-LOGOS  [OSHW-LOGO-S]  28.96,72.57 0 bottom
LOGO35  SFE_LOGO_FLAME.1_INCH  [SFE_LOGO_FLAME_.1]  26.44,80.37 0 top
LOGO36  QWIIC_LOGO_5MM  [QWIIC_5MM]  29.21,76.38 0 top
LOGO37  SFE_LOGO_NAME_FLAME.1_INCH  [SFE_LOGO_NAME_FLAME_.1]  45.62,79.02 0 bottom
LOGO38  OSHW-LOGOS  [OSHW-LOGO-S]  54.86,72.57 0 bottom
LOGO39  SFE_LOGO_FLAME.1_INCH  [SFE_LOGO_FLAME_.1]  52.35,80.37 0 top
LOGO40  QWIIC_LOGO_5MM  [QWIIC_5MM]  55.12,76.38 0 top
LOGO41  SFE_LOGO_NAME_FLAME.1_INCH  [SFE_LOGO_NAME_FLAME_.1]  71.53,79.02 0 bottom
LOGO42  OSHW-LOGOS  [OSHW-LOGO-S]  80.77,72.57 0 bottom
LOGO43  SFE_LOGO_FLAME.1_INCH  [SFE_LOGO_FLAME_.1]  78.26,80.37 0 top
LOGO44  QWIIC_LOGO_5MM  [QWIIC_5MM]  81.03,76.38 0 top
LOGO45  SFE_LOGO_NAME_FLAME.1_INCH  [SFE_LOGO_NAME_FLAME_.1]  97.43,79.02 0 bottom
LOGO46  OSHW-LOGOS  [OSHW-LOGO-S]  106.68,72.57 0 bottom
LOGO47  SFE_LOGO_FLAME.1_INCH  [SFE_LOGO_FLAME_.1]  104.17,80.37 0 top
LOGO48  QWIIC_LOGO_5MM  [QWIIC_5MM]  106.93,76.38 0 top
LOGO49  SFE_LOGO_NAME_FLAME.1_INCH  [SFE_LOGO_NAME_FLAME_.1]  19.71,104.93 0 bottom
LOGO50  OSHW-LOGOS  [OSHW-LOGO-S]  28.96,98.48 0 bottom
LOGO51  SFE_LOGO_FLAME.1_INCH  [SFE_LOGO_FLAME_.1]  26.44,106.27 0 top
LOGO52  QWIIC_LOGO_5MM  [QWIIC_5MM]  29.21,102.29 0 top
LOGO53  SFE_LOGO_NAME_FLAME.1_INCH  [SFE_LOGO_NAME_FLAME_.1]  45.62,104.93 0 bottom
LOGO54  OSHW-LOGOS  [OSHW-LOGO-S]  54.86,98.48 0 bottom
LOGO55  SFE_LOGO_FLAME.1_INCH  [SFE_LOGO_FLAME_.1]  52.35,106.27 0 top
LOGO56  QWIIC_LOGO_5MM  [QWIIC_5MM]  55.12,102.29 0 top
LOGO57  SFE_LOGO_NAME_FLAME.1_INCH  [SFE_LOGO_NAME_FLAME_.1]  71.53,104.93 0 bottom
LOGO58  OSHW-LOGOS  [OSHW-LOGO-S]  80.77,98.48 0 bottom
LOGO59  SFE_LOGO_FLAME.1_INCH  [SFE_LOGO_FLAME_.1]  78.26,106.27 0 top
LOGO60  QWIIC_LOGO_5MM  [QWIIC_5MM]  81.03,102.29 0 top
LOGO61  SFE_LOGO_NAME_FLAME.1_INCH  [SFE_LOGO_NAME_FLAME_.1]  97.43,104.93 0 bottom
LOGO62  OSHW-LOGOS  [OSHW-LOGO-S]  106.68,98.48 0 bottom
LOGO63  SFE_LOGO_FLAME.1_INCH  [SFE_LOGO_FLAME_.1]  104.17,106.27 0 top
LOGO64  QWIIC_LOGO_5MM  [QWIIC_5MM]  106.93,102.29 0 top
LOGO65  SFE_LOGO_NAME_FLAME.1_INCH  [SFE_LOGO_NAME_FLAME_.1]  19.71,130.84 0 bottom
LOGO66  OSHW-LOGOS  [OSHW-LOGO-S]  28.96,124.38 0 bottom
LOGO67  SFE_LOGO_FLAME.1_INCH  [SFE_LOGO_FLAME_.1]  26.44,132.18 0 top
LOGO68  QWIIC_LOGO_5MM  [QWIIC_5MM]  29.21,128.19 0 top
LOGO69  SFE_LOGO_NAME_FLAME.1_INCH  [SFE_LOGO_NAME_FLAME_.1]  45.62,130.84 0 bottom
LOGO70  OSHW-LOGOS  [OSHW-LOGO-S]  54.86,124.38 0 bottom
LOGO71  SFE_LOGO_FLAME.1_INCH  [SFE_LOGO_FLAME_.1]  52.35,132.18 0 top
LOGO72  QWIIC_LOGO_5MM  [QWIIC_5MM]  55.12,128.19 0 top
LOGO73  SFE_LOGO_NAME_FLAME.1_INCH  [SFE_LOGO_NAME_FLAME_.1]  71.53,130.84 0 bottom
LOGO74  OSHW-LOGOS  [OSHW-LOGO-S]  80.77,124.38 0 bottom
LOGO75  SFE_LOGO_FLAME.1_INCH  [SFE_LOGO_FLAME_.1]  78.26,132.18 0 top
LOGO76  QWIIC_LOGO_5MM  [QWIIC_5MM]  81.03,128.19 0 top
LOGO77  SFE_LOGO_NAME_FLAME.1_INCH  [SFE_LOGO_NAME_FLAME_.1]  97.43,130.84 0 bottom
LOGO78  OSHW-LOGOS  [OSHW-LOGO-S]  106.68,124.38 0 bottom
LOGO79  SFE_LOGO_FLAME.1_INCH  [SFE_LOGO_FLAME_.1]  104.17,132.18 0 top
LOGO80  QWIIC_LOGO_5MM  [QWIIC_5MM]  106.93,128.19 0 top
LOGO81  SFE_LOGO_NAME_FLAME.1_INCH  [SFE_LOGO_NAME_FLAME_.1]  19.71,156.74 0 bottom
LOGO82  OSHW-LOGOS  [OSHW-LOGO-S]  28.96,150.29 0 bottom
LOGO83  SFE_LOGO_FLAME.1_INCH  [SFE_LOGO_FLAME_.1]  26.44,158.09 0 top
LOGO84  QWIIC_LOGO_5MM  [QWIIC_5MM]  29.21,154.1 0 top
LOGO85  SFE_LOGO_NAME_FLAME.1_INCH  [SFE_LOGO_NAME_FLAME_.1]  45.62,156.74 0 bottom
LOGO86  OSHW-LOGOS  [OSHW-LOGO-S]  54.86,150.29 0 bottom
LOGO87  SFE_LOGO_FLAME.1_INCH  [SFE_LOGO_FLAME_.1]  52.35,158.09 0 top
LOGO88  QWIIC_LOGO_5MM  [QWIIC_5MM]  55.12,154.1 0 top
LOGO89  SFE_LOGO_NAME_FLAME.1_INCH  [SFE_LOGO_NAME_FLAME_.1]  71.53,156.74 0 bottom
LOGO90  OSHW-LOGOS  [OSHW-LOGO-S]  80.77,150.29 0 bottom
LOGO91  SFE_LOGO_FLAME.1_INCH  [SFE_LOGO_FLAME_.1]  78.26,158.09 0 top
LOGO92  QWIIC_LOGO_5MM  [QWIIC_5MM]  81.03,154.1 0 top
LOGO93  SFE_LOGO_NAME_FLAME.1_INCH  [SFE_LOGO_NAME_FLAME_.1]  97.43,156.74 0 bottom
LOGO94  OSHW-LOGOS  [OSHW-LOGO-S]  106.68,150.29 0 bottom
LOGO95  SFE_LOGO_FLAME.1_INCH  [SFE_LOGO_FLAME_.1]  104.17,158.09 0 top
LOGO96  QWIIC_LOGO_5MM  [QWIIC_5MM]  106.93,154.1 0 top
Q1  20V/0.2A/8MHz/1.2Ω/1Vth  [SOT-416FL]  41.66,19.56 90 top
Q2  20V/0.2A/8MHz/1.2Ω/1Vth  [SOT-416FL]  49.28,19.56 270 top
Q3  20V/0.2A/8MHz/1.2Ω/1Vth  [SOT-416FL]  67.56,19.56 90 top
Q4  20V/0.2A/8MHz/1.2Ω/1Vth  [SOT-416FL]  75.18,19.56 270 top
Q5  20V/0.2A/8MHz/1.2Ω/1Vth  [SOT-416FL]  93.47,19.56 90 top
Q6  20V/0.2A/8MHz/1.2Ω/1Vth  [SOT-416FL]  15.75,19.56 90 top
Q7  20V/0.2A/8MHz/1.2Ω/1Vth  [SOT-416FL]  101.09,19.56 270 top
Q8  20V/0.2A/8MHz/1.2Ω/1Vth  [SOT-416FL]  23.37,19.56 270 top
Q9  20V/0.2A/8MHz/1.2Ω/1Vth  [SOT-416FL]  15.75,45.47 90 top
Q10  20V/0.2A/8MHz/1.2Ω/1Vth  [SOT-416FL]  23.37,45.47 270 top
Q11  20V/0.2A/8MHz/1.2Ω/1Vth  [SOT-416FL]  41.66,45.47 90 top
Q12  20V/0.2A/8MHz/1.2Ω/1Vth  [SOT-416FL]  49.28,45.47 270 top
Q13  20V/0.2A/8MHz/1.2Ω/1Vth  [SOT-416FL]  67.56,45.47 90 top
Q14  20V/0.2A/8MHz/1.2Ω/1Vth  [SOT-416FL]  75.18,45.47 270 top
Q15  20V/0.2A/8MHz/1.2Ω/1Vth  [SOT-416FL]  93.47,45.47 90 top
Q16  20V/0.2A/8MHz/1.2Ω/1Vth  [SOT-416FL]  101.09,45.47 270 top
Q17  20V/0.2A/8MHz/1.2Ω/1Vth  [SOT-416FL]  15.75,71.37 90 top
Q18  20V/0.2A/8MHz/1.2Ω/1Vth  [SOT-416FL]  23.37,71.37 270 top
Q19  20V/0.2A/8MHz/1.2Ω/1Vth  [SOT-416FL]  41.66,71.37 90 top
Q20  20V/0.2A/8MHz/1.2Ω/1Vth  [SOT-416FL]  49.28,71.37 270 top
Q21  20V/0.2A/8MHz/1.2Ω/1Vth  [SOT-416FL]  67.56,71.37 90 top
Q22  20V/0.2A/8MHz/1.2Ω/1Vth  [SOT-416FL]  75.18,71.37 270 top
Q23  20V/0.2A/8MHz/1.2Ω/1Vth  [SOT-416FL]  93.47,71.37 90 top
Q24  20V/0.2A/8MHz/1.2Ω/1Vth  [SOT-416FL]  101.09,71.37 270 top
Q25  20V/0.2A/8MHz/1.2Ω/1Vth  [SOT-416FL]  15.75,97.28 90 top
Q26  20V/0.2A/8MHz/1.2Ω/1Vth  [SOT-416FL]  23.37,97.28 270 top
Q27  20V/0.2A/8MHz/1.2Ω/1Vth  [SOT-416FL]  41.66,97.28 90 top
Q28  20V/0.2A/8MHz/1.2Ω/1Vth  [SOT-416FL]  49.28,97.28 270 top
Q29  20V/0.2A/8MHz/1.2Ω/1Vth  [SOT-416FL]  67.56,97.28 90 top
Q30  20V/0.2A/8MHz/1.2Ω/1Vth  [SOT-416FL]  75.18,97.28 270 top
Q31  20V/0.2A/8MHz/1.2Ω/1Vth  [SOT-416FL]  93.47,97.28 90 top
Q32  20V/0.2A/8MHz/1.2Ω/1Vth  [SOT-416FL]  101.09,97.28 270 top
Q33  20V/0.2A/8MHz/1.2Ω/1Vth  [SOT-416FL]  15.75,123.19 90 top
Q34  20V/0.2A/8MHz/1.2Ω/1Vth  [SOT-416FL]  23.37,123.19 270 top
Q35  20V/0.2A/8MHz/1.2Ω/1Vth  [SOT-416FL]  41.66,123.19 90 top
Q36  20V/0.2A/8MHz/1.2Ω/1Vth  [SOT-416FL]  49.28,123.19 270 top
Q37  20V/0.2A/8MHz/1.2Ω/1Vth  [SOT-416FL]  67.56,123.19 90 top
Q38  20V/0.2A/8MHz/1.2Ω/1Vth  [SOT-416FL]  75.18,123.19 270 top
Q39  20V/0.2A/8MHz/1.2Ω/1Vth  [SOT-416FL]  93.47,123.19 90 top
Q40  20V/0.2A/8MHz/1.2Ω/1Vth  [SOT-416FL]  101.09,123.19 270 top
Q41  20V/0.2A/8MHz/1.2Ω/1Vth  [SOT-416FL]  15.75,149.1 90 top
Q42  20V/0.2A/8MHz/1.2Ω/1Vth  [SOT-416FL]  23.37,149.1 270 top
Q43  20V/0.2A/8MHz/1.2Ω/1Vth  [SOT-416FL]  41.66,149.1 90 top
Q44  20V/0.2A/8MHz/1.2Ω/1Vth  [SOT-416FL]  49.28,149.1 270 top
Q45  20V/0.2A/8MHz/1.2Ω/1Vth  [SOT-416FL]  67.56,149.1 90 top
Q46  20V/0.2A/8MHz/1.2Ω/1Vth  [SOT-416FL]  75.18,149.1 270 top
Q47  20V/0.2A/8MHz/1.2Ω/1Vth  [SOT-416FL]  93.47,149.1 90 top
Q48  20V/0.2A/8MHz/1.2Ω/1Vth  [SOT-416FL]  101.09,149.1 270 top
R1  750K  [0603]  14.07,26.24 270 top
R2  4.7k  [0603]  55.37,14.73 0 top
R3  1k  [0603]  12.83,15.11 180 top
R4  100k  [0603]  16.76,26.39 180 top
R5  4.7k  [0603]  29.46,14.73 0 top
R6  1k  [0603]  38.73,15.11 180 top
R7  2.2k  [0603]  44.2,19.56 270 top
R8  2.2k  [0603]  34.21,25.07 90 top
R9  2.2k  [0603]  46.74,19.56 90 top
R10  2.2k  [0603]  36.4,25.04 90 top
R11  750K  [0603]  39.98,26.24 270 top
R12  100k  [0603]  42.67,26.39 180 top
R13  4.7k  [0603]  81.28,14.73 0 top
R14  2.2k  [0603]  18.29,19.56 270 top
R15  2.2k  [0603]  8.31,25.07 90 top
R16  2.2k  [0603]  20.83,19.56 90 top
R17  2.2k  [0603]  10.49,25.04 90 top
R18  1k  [0603]  64.64,15.11 180 top
R19  2.2k  [0603]  70.1,19.56 270 top
R20  2.2k  [0603]  60.12,25.07 90 top
R21  2.2k  [0603]  72.64,19.56 90 top
R22  2.2k  [0603]  62.31,25.04 90 top
R23  750K  [0603]  65.89,26.24 270 top
R24  100k  [0603]  68.58,26.39 180 top
R25  4.7k  [0603]  107.19,14.73 0 top
R26  1k  [0603]  90.55,15.11 180 top
R27  2.2k  [0603]  96.01,19.56 270 top
R28  2.2k  [0603]  86.03,25.07 90 top
R29  2.2k  [0603]  98.55,19.56 90 top
R30  2.2k  [0603]  88.21,25.04 90 top
R31  750K  [0603]  91.8,26.24 270 top
R32  100k  [0603]  94.49,26.39 180 top
R33  4.7k  [0603]  29.46,40.64 0 top
R34  1k  [0603]  12.83,41.02 180 top
R35  2.2k  [0603]  18.29,45.47 270 top
R36  2.2k  [0603]  8.31,50.98 90 top
R37  2.2k  [0603]  20.83,45.47 90 top
R38  2.2k  [0603]  10.49,50.95 90 top
R39  750K  [0603]  14.07,52.15 270 top
R40  100k  [0603]  16.76,52.3 180 top
R41  4.7k  [0603]  55.37,40.64 0 top
R42  1k  [0603]  38.73,41.02 180 top
R43  2.2k  [0603]  44.2,45.47 270 top
R44  2.2k  [0603]  34.21,50.98 90 top
R45  2.2k  [0603]  46.74,45.47 90 top
R46  2.2k  [0603]  36.4,50.95 90 top
R47  750K  [0603]  39.98,52.15 270 top
R48  100k  [0603]  42.67,52.3 180 top
R49  4.7k  [0603]  81.28,40.64 0 top
R50  1k  [0603]  64.64,41.02 180 top
R51  2.2k  [0603]  70.1,45.47 270 top
R52  2.2k  [0603]  60.12,50.98 90 top
R53  2.2k  [0603]  72.64,45.47 90 top
R54  2.2k  [0603]  62.31,50.95 90 top
R55  750K  [0603]  65.89,52.15 270 top
R56  100k  [0603]  68.58,52.3 180 top
R57  4.7k  [0603]  107.19,40.64 0 top
R58  1k  [0603]  90.55,41.02 180 top
R59  2.2k  [0603]  96.01,45.47 270 top
R60  2.2k  [0603]  86.03,50.98 90 top
R61  2.2k  [0603]  98.55,45.47 90 top
R62  2.2k  [0603]  88.21,50.95 90 top
R63  750K  [0603]  91.8,52.15 270 top
R64  100k  [0603]  94.49,52.3 180 top
R65  4.7k  [0603]  29.46,66.55 0 top
R66  1k  [0603]  12.83,66.93 180 top
R67  2.2k  [0603]  18.29,71.37 270 top
R68  2.2k  [0603]  8.31,76.89 90 top
R69  2.2k  [0603]  20.83,71.37 90 top
R70  2.2k  [0603]  10.49,76.86 90 top
R71  750K  [0603]  14.07,78.05 270 top
R72  100k  [0603]  16.76,78.21 180 top
R73  4.7k  [0603]  55.37,66.55 0 top
R74  1k  [0603]  38.73,66.93 180 top
R75  2.2k  [0603]  44.2,71.37 270 top
R76  2.2k  [0603]  34.21,76.89 90 top
R77  2.2k  [0603]  46.74,71.37 90 top
R78  2.2k  [0603]  36.4,76.86 90 top
R79  750K  [0603]  39.98,78.05 270 top
R80  100k  [0603]  42.67,78.21 180 top
R81  4.7k  [0603]  81.28,66.55 0 top
R82  1k  [0603]  64.64,66.93 180 top
R83  2.2k  [0603]  70.1,71.37 270 top
R84  2.2k  [0603]  60.12,76.89 90 top
R85  2.2k  [0603]  72.64,71.37 90 top
R86  2.2k  [0603]  62.31,76.86 90 top
R87  750K  [0603]  65.89,78.05 270 top
R88  100k  [0603]  68.58,78.21 180 top
R89  4.7k  [0603]  107.19,66.55 0 top
R90  1k  [0603]  90.55,66.93 180 top
R91  2.2k  [0603]  96.01,71.37 270 top
R92  2.2k  [0603]  86.03,76.89 90 top
R93  2.2k  [0603]  98.55,71.37 90 top
R94  2.2k  [0603]  88.21,76.86 90 top
R95  750K  [0603]  91.8,78.05 270 top
R96  100k  [0603]  94.49,78.21 180 top
R97  4.7k  [0603]  29.46,92.46 0 top
R98  1k  [0603]  12.83,92.84 180 top
R99  2.2k  [0603]  18.29,97.28 270 top
R100  2.2k  [0603]  8.31,102.79 90 top
R101  2.2k  [0603]  20.83,97.28 90 top
R102  2.2k  [0603]  10.49,102.77 90 top
R103  750K  [0603]  14.07,103.96 270 top
R104  100k  [0603]  16.76,104.11 180 top
R105  4.7k  [0603]  55.37,92.46 0 top
R106  1k  [0603]  38.73,92.84 180 top
R107  2.2k  [0603]  44.2,97.28 270 top
R108  2.2k  [0603]  34.21,102.79 90 top
R109  2.2k  [0603]  46.74,97.28 90 top
R110  2.2k  [0603]  36.4,102.77 90 top
R111  750K  [0603]  39.98,103.96 270 top
R112  100k  [0603]  42.67,104.11 180 top
R113  4.7k  [0603]  81.28,92.46 0 top
R114  1k  [0603]  64.64,92.84 180 top
R115  2.2k  [0603]  70.1,97.28 270 top
R116  2.2k  [0603]  60.12,102.79 90 top
R117  2.2k  [0603]  72.64,97.28 90 top
R118  2.2k  [0603]  62.31,102.77 90 top
R119  750K  [0603]  65.89,103.96 270 top
R120  100k  [0603]  68.58,104.11 180 top
R121  4.7k  [0603]  107.19,92.46 0 top
R122  1k  [0603]  90.55,92.84 180 top
R123  2.2k  [0603]  96.01,97.28 270 top
R124  2.2k  [0603]  86.03,102.79 90 top
R125  2.2k  [0603]  98.55,97.28 90 top
R126  2.2k  [0603]  88.21,102.77 90 top
R127  750K  [0603]  91.8,103.96 270 top
R128  100k  [0603]  94.49,104.11 180 top
R129  4.7k  [0603]  29.46,118.36 0 top
R130  1k  [0603]  12.83,118.75 180 top
R131  2.2k  [0603]  18.29,123.19 270 top
R132  2.2k  [0603]  8.31,128.7 90 top
R133  2.2k  [0603]  20.83,123.19 90 top
R134  2.2k  [0603]  10.49,128.68 90 top
R135  750K  [0603]  14.07,129.87 270 top
R136  100k  [0603]  16.76,130.02 180 top
R137  4.7k  [0603]  55.37,118.36 0 top
R138  1k  [0603]  38.73,118.75 180 top
R139  2.2k  [0603]  44.2,123.19 270 top
R140  2.2k  [0603]  34.21,128.7 90 top
R141  2.2k  [0603]  46.74,123.19 90 top
R142  2.2k  [0603]  36.4,128.68 90 top
R143  750K  [0603]  39.98,129.87 270 top
R144  100k  [0603]  42.67,130.02 180 top
R145  4.7k  [0603]  81.28,118.36 0 top
R146  1k  [0603]  64.64,118.75 180 top
R147  2.2k  [0603]  70.1,123.19 270 top
R148  2.2k  [0603]  60.12,128.7 90 top
R149  2.2k  [0603]  72.64,123.19 90 top
R150  2.2k  [0603]  62.31,128.68 90 top
R151  750K  [0603]  65.89,129.87 270 top
R152  100k  [0603]  68.58,130.02 180 top
R153  4.7k  [0603]  107.19,118.36 0 top
R154  1k  [0603]  90.55,118.75 180 top
R155  2.2k  [0603]  96.01,123.19 270 top
R156  2.2k  [0603]  86.03,128.7 90 top
R157  2.2k  [0603]  98.55,123.19 90 top
R158  2.2k  [0603]  88.21,128.68 90 top
R159  750K  [0603]  91.8,129.87 270 top
R160  100k  [0603]  94.49,130.02 180 top
R161  4.7k  [0603]  29.46,144.27 0 top
R162  1k  [0603]  12.83,144.65 180 top
R163  2.2k  [0603]  18.29,149.1 270 top
R164  2.2k  [0603]  8.31,154.61 90 top
R165  2.2k  [0603]  20.83,149.1 90 top
R166  2.2k  [0603]  10.49,154.58 90 top
R167  750K  [0603]  14.07,155.78 270 top
R168  100k  [0603]  16.76,155.93 180 top
R169  4.7k  [0603]  55.37,144.27 0 top
R170  1k  [0603]  38.73,144.65 180 top
R171  2.2k  [0603]  44.2,149.1 270 top
R172  2.2k  [0603]  34.21,154.61 90 top
R173  2.2k  [0603]  46.74,149.1 90 top
R174  2.2k  [0603]  36.4,154.58 90 top
R175  750K  [0603]  39.98,155.78 270 top
R176  100k  [0603]  42.67,155.93 180 top
R177  4.7k  [0603]  81.28,144.27 0 top
R178  1k  [0603]  64.64,144.65 180 top
R179  2.2k  [0603]  70.1,149.1 270 top
R180  2.2k  [0603]  60.12,154.61 90 top
R181  2.2k  [0603]  72.64,149.1 90 top
R182  2.2k  [0603]  62.31,154.58 90 top
R183  750K  [0603]  65.89,155.78 270 top
R184  100k  [0603]  68.58,155.93 180 top
R185  4.7k  [0603]  107.19,144.27 0 top
R186  1k  [0603]  90.55,144.65 180 top
R187  2.2k  [0603]  96.01,149.1 270 top
R188  2.2k  [0603]  86.03,154.61 90 top
R189  2.2k  [0603]  98.55,149.1 90 top
R190  2.2k  [0603]  88.21,154.58 90 top
R191  750K  [0603]  91.8,155.78 270 top
R192  100k  [0603]  94.49,155.93 180 top
STANDOFF1  STAND-OFF  [STAND-OFF]  9.4,29.72 90 top
STANDOFF2  STAND-OFF  [STAND-OFF]  29.72,29.72 90 top
STANDOFF3  STAND-OFF  [STAND-OFF]  29.72,9.4 90 top
STANDOFF4  STAND-OFF  [STAND-OFF]  9.4,9.4 90 top
STANDOFF5  STAND-OFF  [STAND-OFF]  35.31,9.4 90 top
STANDOFF6  STAND-OFF  [STAND-OFF]  55.63,9.4 90 top
STANDOFF7  STAND-OFF  [STAND-OFF]  55.63,29.72 90 top
STANDOFF8  STAND-OFF  [STAND-OFF]  35.31,29.72 90 top
STANDOFF9  STAND-OFF  [STAND-OFF]  61.21,9.4 90 top
STANDOFF10  STAND-OFF  [STAND-OFF]  81.53,9.4 90 top
STANDOFF11  STAND-OFF  [STAND-OFF]  81.53,29.72 90 top
STANDOFF12  STAND-OFF  [STAND-OFF]  61.21,29.72 90 top
STANDOFF13  STAND-OFF  [STAND-OFF]  87.12,9.4 90 top
STANDOFF14  STAND-OFF  [STAND-OFF]  107.44,9.4 90 top
STANDOFF15  STAND-OFF  [STAND-OFF]  107.44,29.72 90 top
STANDOFF16  STAND-OFF  [STAND-OFF]  87.12,29.72 90 top
STANDOFF17  STAND-OFF  [STAND-OFF]  9.4,35.31 90 top
STANDOFF18  STAND-OFF  [STAND-OFF]  29.72,35.31 90 top
STANDOFF19  STAND-OFF  [STAND-OFF]  29.72,55.63 90 top
STANDOFF20  STAND-OFF  [STAND-OFF]  9.4,55.63 90 top
STANDOFF21  STAND-OFF  [STAND-OFF]  35.31,35.31 90 top
STANDOFF22  STAND-OFF  [STAND-OFF]  55.63,35.31 90 top
STANDOFF23  STAND-OFF  [STAND-OFF]  55.63,55.63 90 top
STANDOFF24  STAND-OFF  [STAND-OFF]  35.31,55.63 90 top
STANDOFF25  STAND-OFF  [STAND-OFF]  61.21,35.31 90 top
STANDOFF26  STAND-OFF  [STAND-OFF]  81.53,35.31 90 top
STANDOFF27  STAND-OFF  [STAND-OFF]  81.53,55.63 90 top
STANDOFF28  STAND-OFF  [STAND-OFF]  61.21,55.63 90 top
STANDOFF29  STAND-OFF  [STAND-OFF]  87.12,35.31 90 top
STANDOFF30  STAND-OFF  [STAND-OFF]  107.44,35.31 90 top
STANDOFF31  STAND-OFF  [STAND-OFF]  107.44,55.63 90 top
STANDOFF32  STAND-OFF  [STAND-OFF]  87.12,55.63 90 top
STANDOFF33  STAND-OFF  [STAND-OFF]  9.4,61.21 90 top
STANDOFF34  STAND-OFF  [STAND-OFF]  29.72,61.21 90 top
STANDOFF35  STAND-OFF  [STAND-OFF]  29.72,81.53 90 top
STANDOFF36  STAND-OFF  [STAND-OFF]  9.4,81.53 90 top
STANDOFF37  STAND-OFF  [STAND-OFF]  35.31,61.21 90 top
STANDOFF38  STAND-OFF  [STAND-OFF]  55.63,61.21 90 top
STANDOFF39  STAND-OFF  [STAND-OFF]  55.63,81.53 90 top
STANDOFF40  STAND-OFF  [STAND-OFF]  35.31,81.53 90 top
STANDOFF41  STAND-OFF  [STAND-OFF]  61.21,61.21 90 top
STANDOFF42  STAND-OFF  [STAND-OFF]  81.53,61.21 90 top
STANDOFF43  STAND-OFF  [STAND-OFF]  81.53,81.53 90 top
STANDOFF44  STAND-OFF  [STAND-OFF]  61.21,81.53 90 top
STANDOFF45  STAND-OFF  [STAND-OFF]  87.12,61.21 90 top
STANDOFF46  STAND-OFF  [STAND-OFF]  107.44,61.21 90 top
STANDOFF47  STAND-OFF  [STAND-OFF]  107.44,81.53 90 top
STANDOFF48  STAND-OFF  [STAND-OFF]  87.12,81.53 90 top
STANDOFF49  STAND-OFF  [STAND-OFF]  9.4,87.12 90 top
STANDOFF50  STAND-OFF  [STAND-OFF]  29.72,87.12 90 top
STANDOFF51  STAND-OFF  [STAND-OFF]  29.72,107.44 90 top
STANDOFF52  STAND-OFF  [STAND-OFF]  9.4,107.44 90 top
STANDOFF53  STAND-OFF  [STAND-OFF]  35.31,87.12 90 top
STANDOFF54  STAND-OFF  [STAND-OFF]  55.63,87.12 90 top
STANDOFF55  STAND-OFF  [STAND-OFF]  55.63,107.44 90 top
STANDOFF56  STAND-OFF  [STAND-OFF]  35.31,107.44 90 top
STANDOFF57  STAND-OFF  [STAND-OFF]  61.21,87.12 90 top
STANDOFF58  STAND-OFF  [STAND-OFF]  81.53,87.12 90 top
STANDOFF59  STAND-OFF  [STAND-OFF]  81.53,107.44 90 top
STANDOFF60  STAND-OFF  [STAND-OFF]  61.21,107.44 90 top
STANDOFF61  STAND-OFF  [STAND-OFF]  87.12,87.12 90 top
STANDOFF62  STAND-OFF  [STAND-OFF]  107.44,87.12 90 top
STANDOFF63  STAND-OFF  [STAND-OFF]  107.44,107.44 90 top
STANDOFF64  STAND-OFF  [STAND-OFF]  87.12,107.44 90 top
STANDOFF65  STAND-OFF  [STAND-OFF]  9.4,113.03 90 top
STANDOFF66  STAND-OFF  [STAND-OFF]  29.72,113.03 90 top
STANDOFF67  STAND-OFF  [STAND-OFF]  29.72,133.35 90 top
STANDOFF68  STAND-OFF  [STAND-OFF]  9.4,133.35 90 top
STANDOFF69  STAND-OFF  [STAND-OFF]  35.31,113.03 90 top
STANDOFF70  STAND-OFF  [STAND-OFF]  55.63,113.03 90 top
STANDOFF71  STAND-OFF  [STAND-OFF]  55.63,133.35 90 top
STANDOFF72  STAND-OFF  [STAND-OFF]  35.31,133.35 90 top
STANDOFF73  STAND-OFF  [STAND-OFF]  61.21,113.03 90 top
STANDOFF74  STAND-OFF  [STAND-OFF]  81.53,113.03 90 top
STANDOFF75  STAND-OFF  [STAND-OFF]  81.53,133.35 90 top
STANDOFF76  STAND-OFF  [STAND-OFF]  61.21,133.35 90 top
STANDOFF77  STAND-OFF  [STAND-OFF]  87.12,113.03 90 top
STANDOFF78  STAND-OFF  [STAND-OFF]  107.44,113.03 90 top
STANDOFF79  STAND-OFF  [STAND-OFF]  107.44,133.35 90 top
STANDOFF80  STAND-OFF  [STAND-OFF]  87.12,133.35 90 top
STANDOFF81  STAND-OFF  [STAND-OFF]  9.4,138.94 90 top
STANDOFF82  STAND-OFF  [STAND-OFF]  29.72,138.94 90 top
STANDOFF83  STAND-OFF  [STAND-OFF]  29.72,159.26 90 top
STANDOFF84  STAND-OFF  [STAND-OFF]  9.4,159.26 90 top
STANDOFF85  STAND-OFF  [STAND-OFF]  35.31,138.94 90 top
STANDOFF86  STAND-OFF  [STAND-OFF]  55.63,138.94 90 top
STANDOFF87  STAND-OFF  [STAND-OFF]  55.63,159.26 90 top
STANDOFF88  STAND-OFF  [STAND-OFF]  35.31,159.26 90 top
STANDOFF89  STAND-OFF  [STAND-OFF]  61.21,138.94 90 top
STANDOFF90  STAND-OFF  [STAND-OFF]  81.53,138.94 90 top
STANDOFF91  STAND-OFF  [STAND-OFF]  81.53,159.26 90 top
STANDOFF92  STAND-OFF  [STAND-OFF]  61.21,159.26 90 top
STANDOFF93  STAND-OFF  [STAND-OFF]  87.12,138.94 90 top
STANDOFF94  STAND-OFF  [STAND-OFF]  107.44,138.94 90 top
STANDOFF95  STAND-OFF  [STAND-OFF]  107.44,159.26 90 top
STANDOFF96  STAND-OFF  [STAND-OFF]  87.12,159.26 90 top
U1  1.8V/100mA  [SC70]  19.56,15.75 0 top
U2  MAX30101EFD  [14_PIN_OESIP]  19.56,29.34 270 top
U3  PAM2401  [MSOP8]  17.96,23.9 90 top
U4  1.8V/100mA  [SC70]  45.47,15.75 0 top
U5  PAM2401  [MSOP8]  43.87,23.9 90 top
U6  MAX30101EFD  [14_PIN_OESIP]  45.47,29.34 270 top
U7  1.8V/100mA  [SC70]  71.37,15.75 0 top
U8  PAM2401  [MSOP8]  69.77,23.9 90 top